# EAGLE board warp-revC (EAGLE 9.4.2)
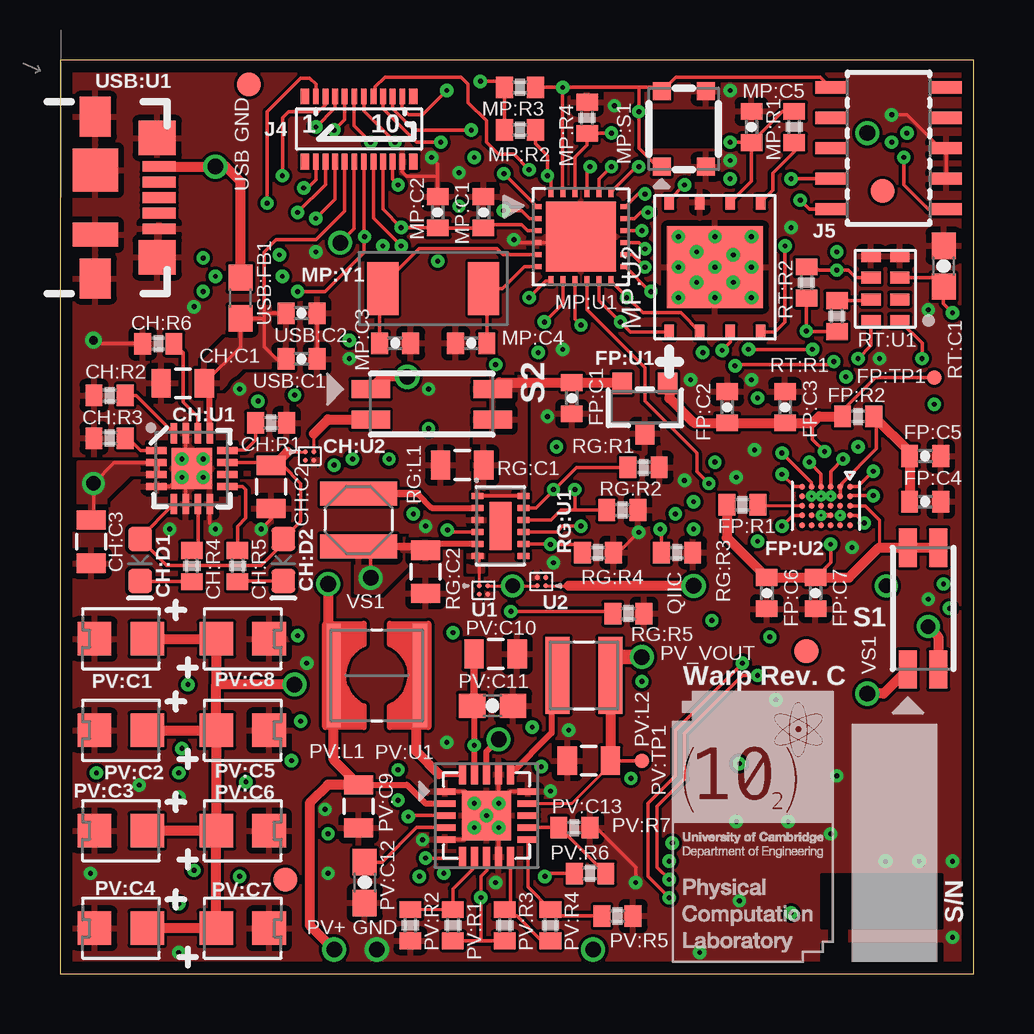
[diagram p0: board, top side]
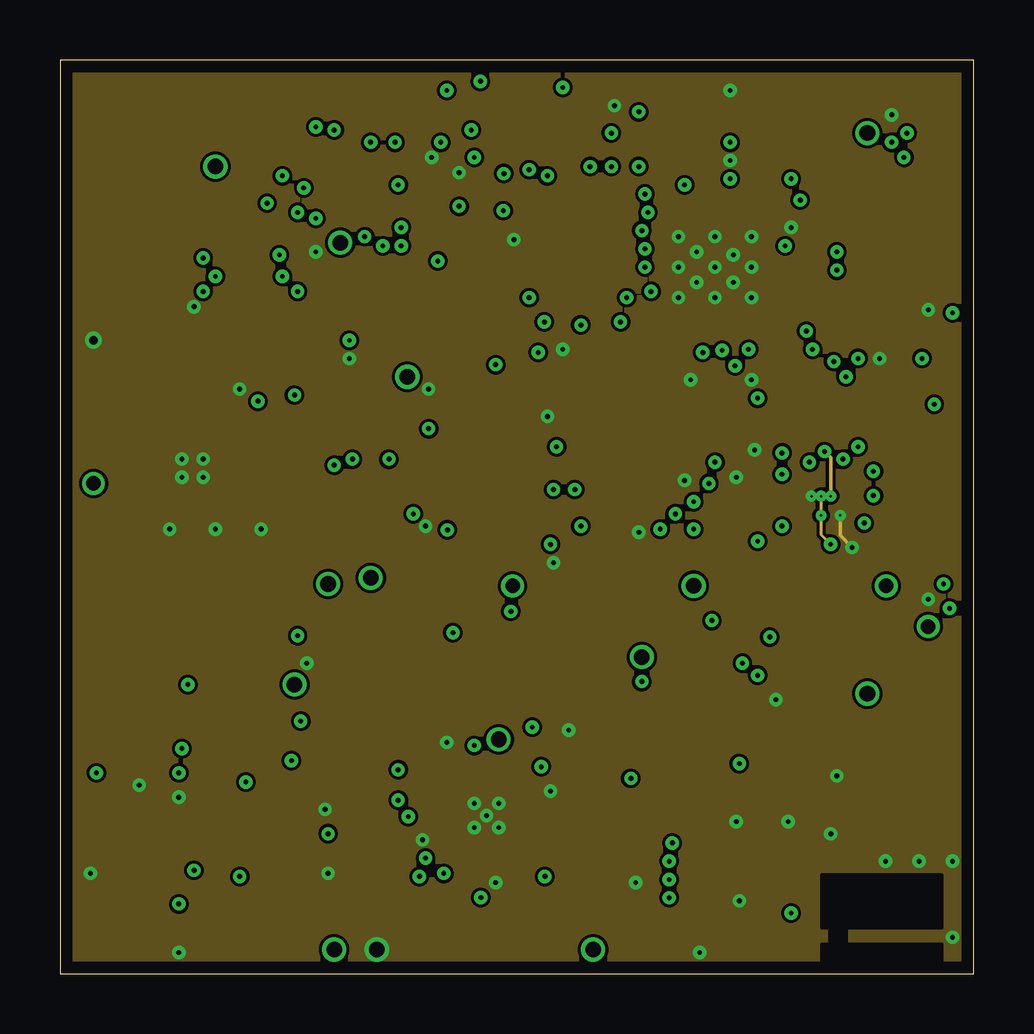
[diagram p1: board, inner layer Route2]
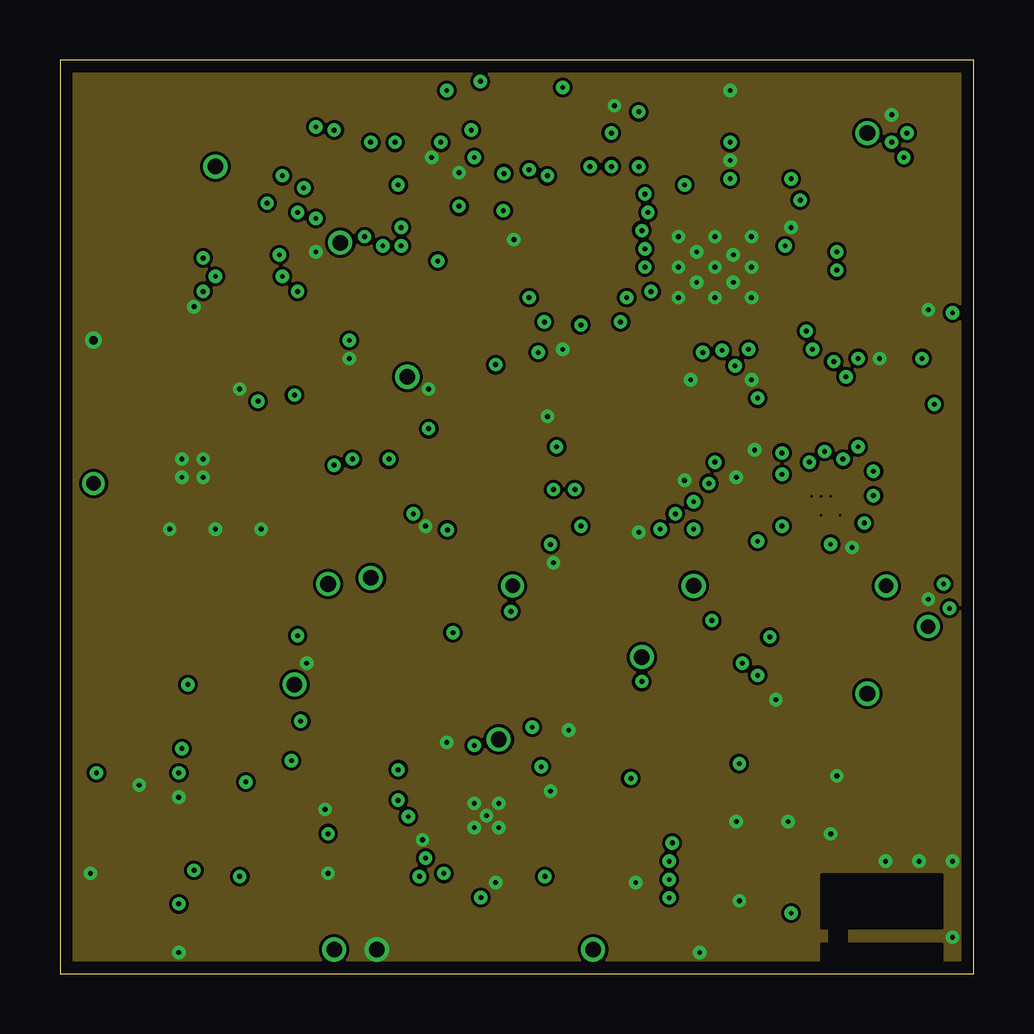
[diagram p2: board, inner layer Route3]
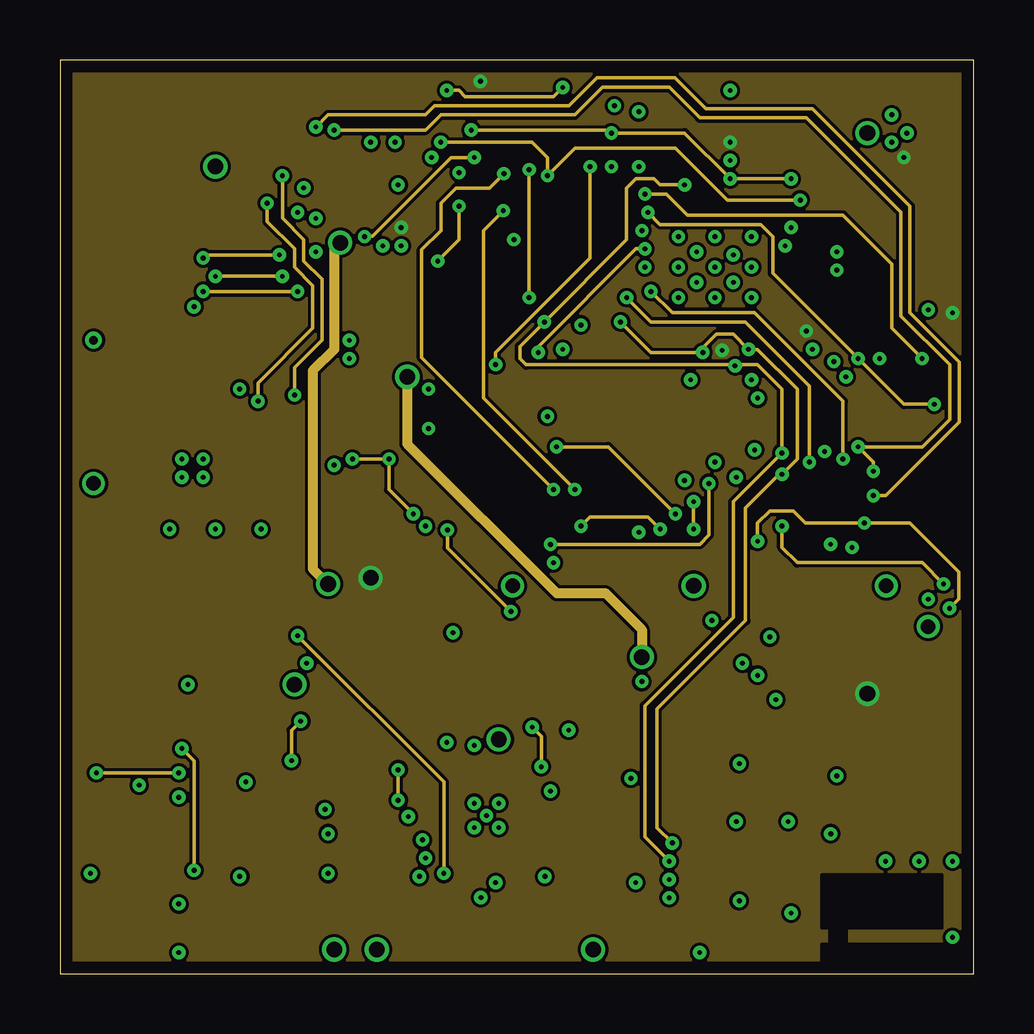
[diagram p3: board, inner layer Route4]
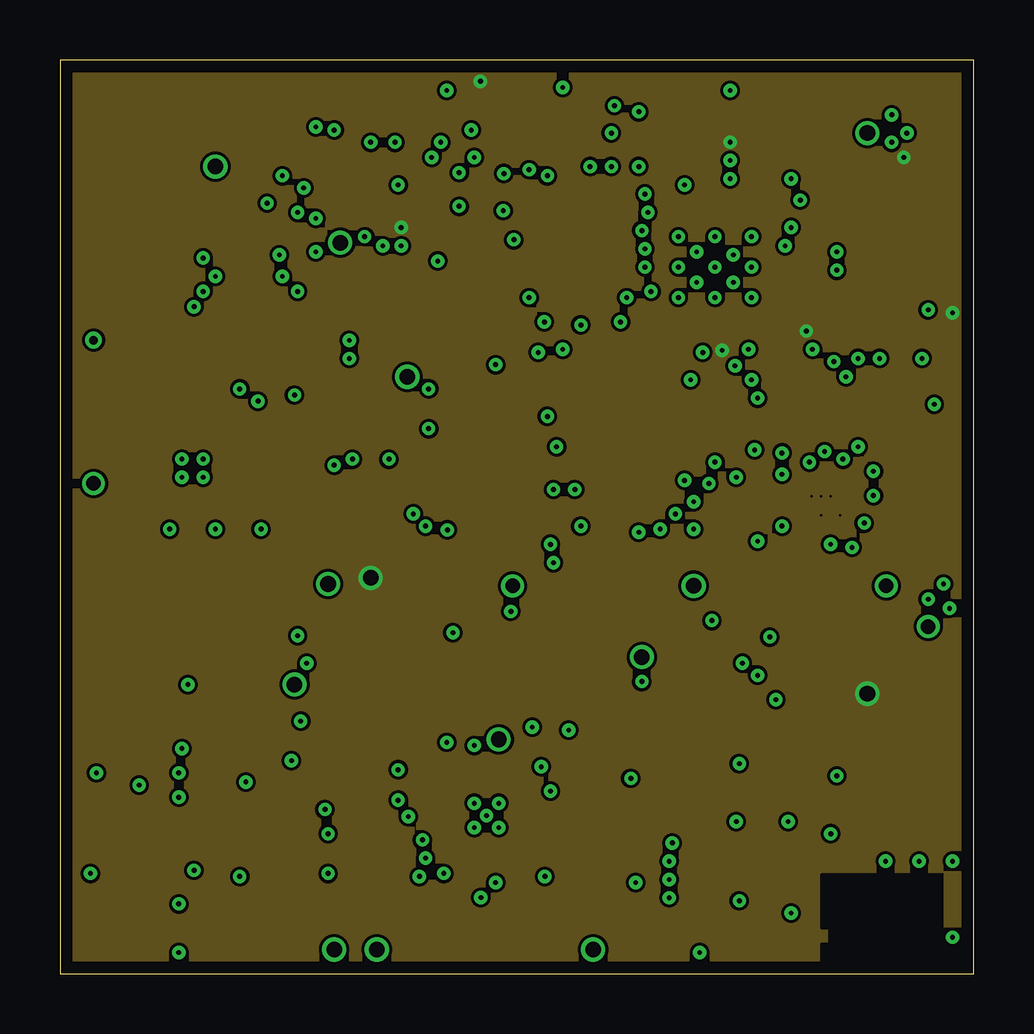
[diagram p4: board, inner layer Route5]
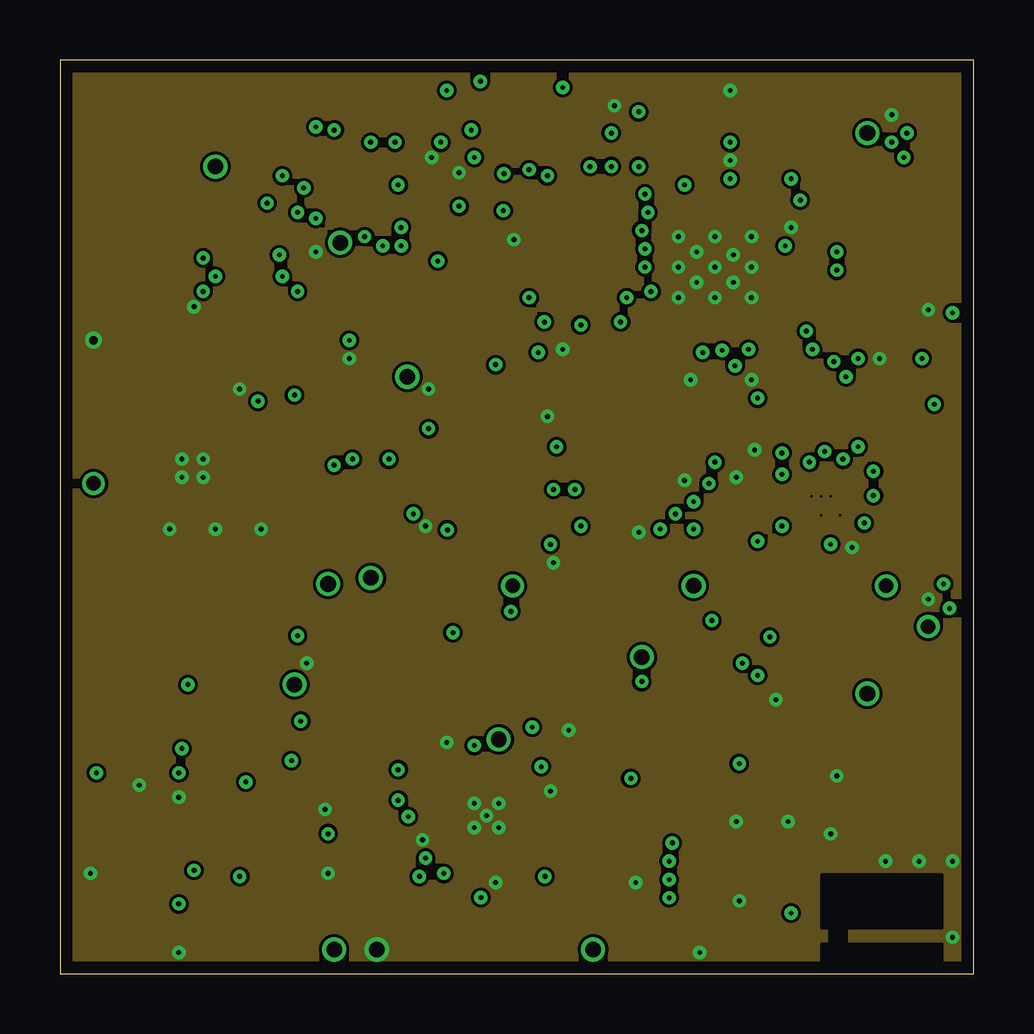
[diagram p5: board, inner layer Route6]
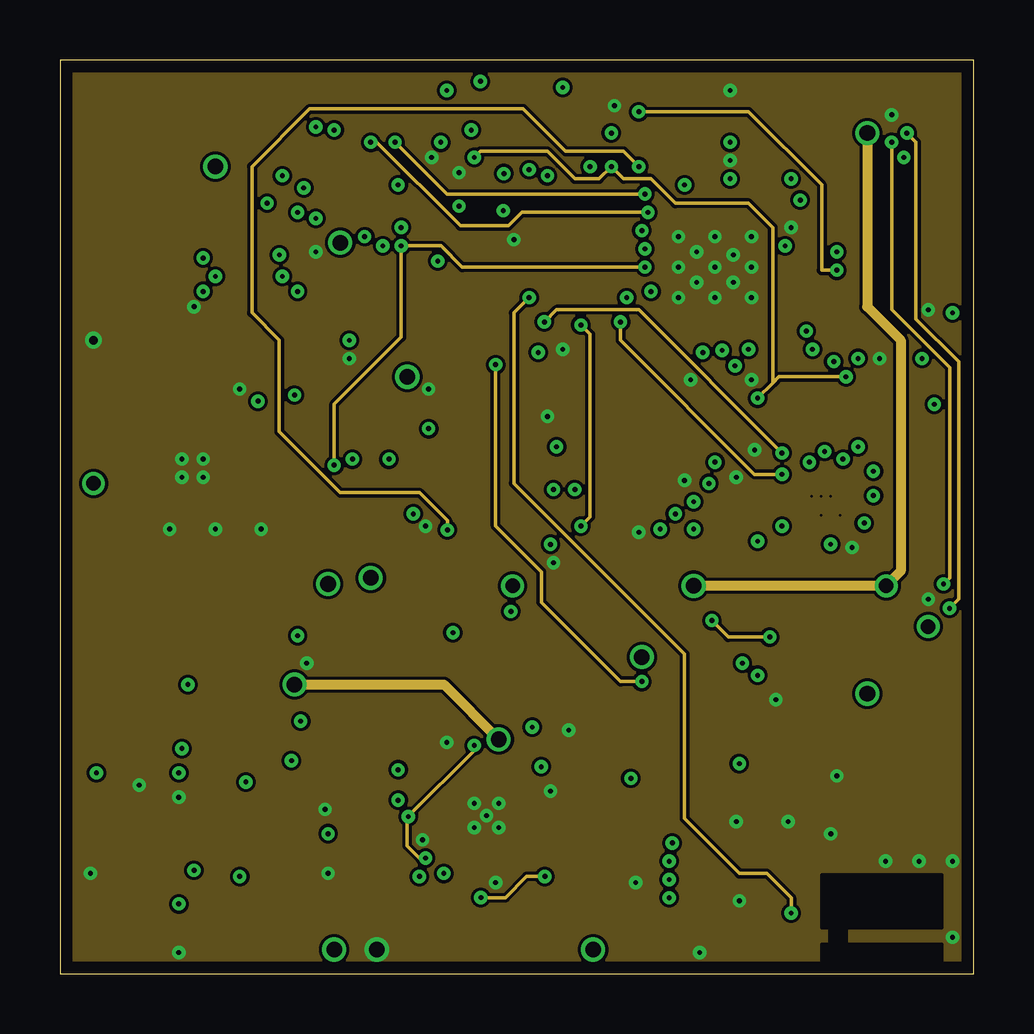
[diagram p6: board, inner layer Route7]
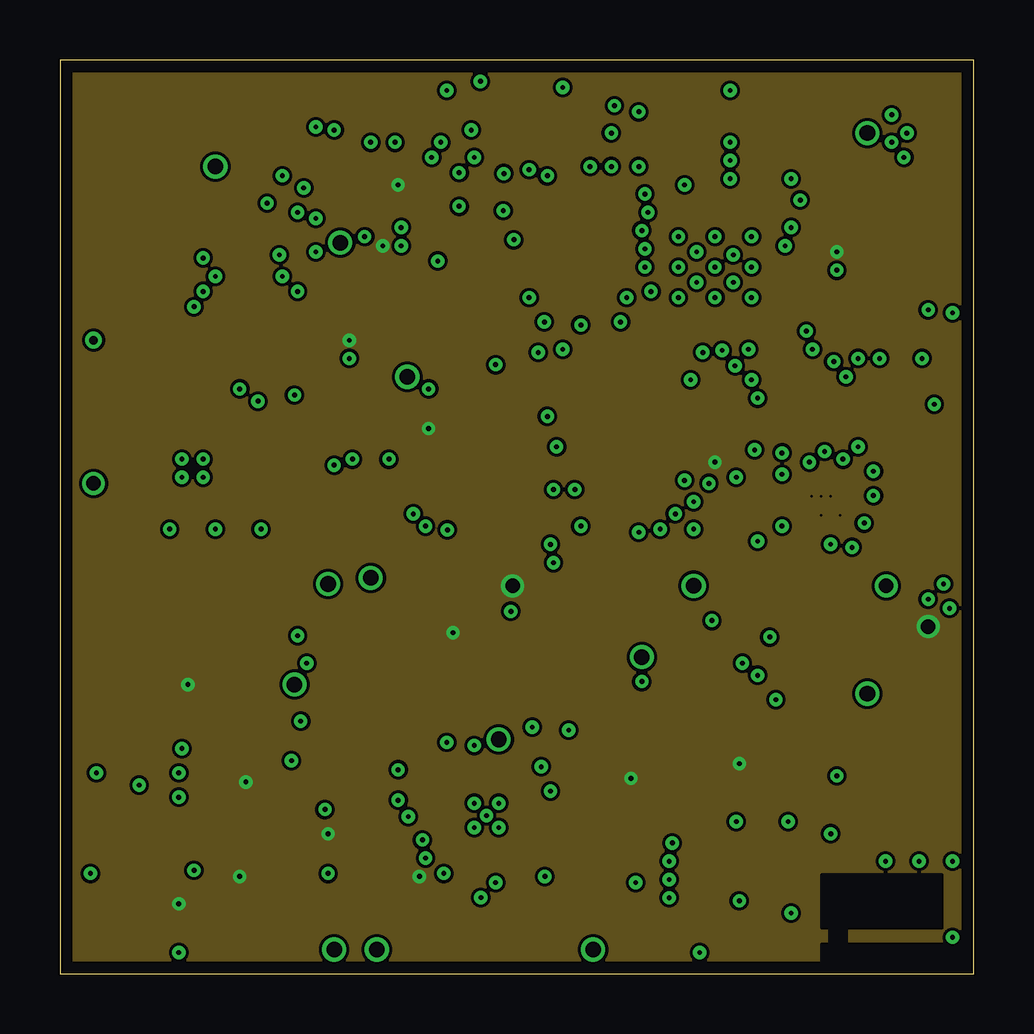
[diagram p7: board, inner layer Route14]
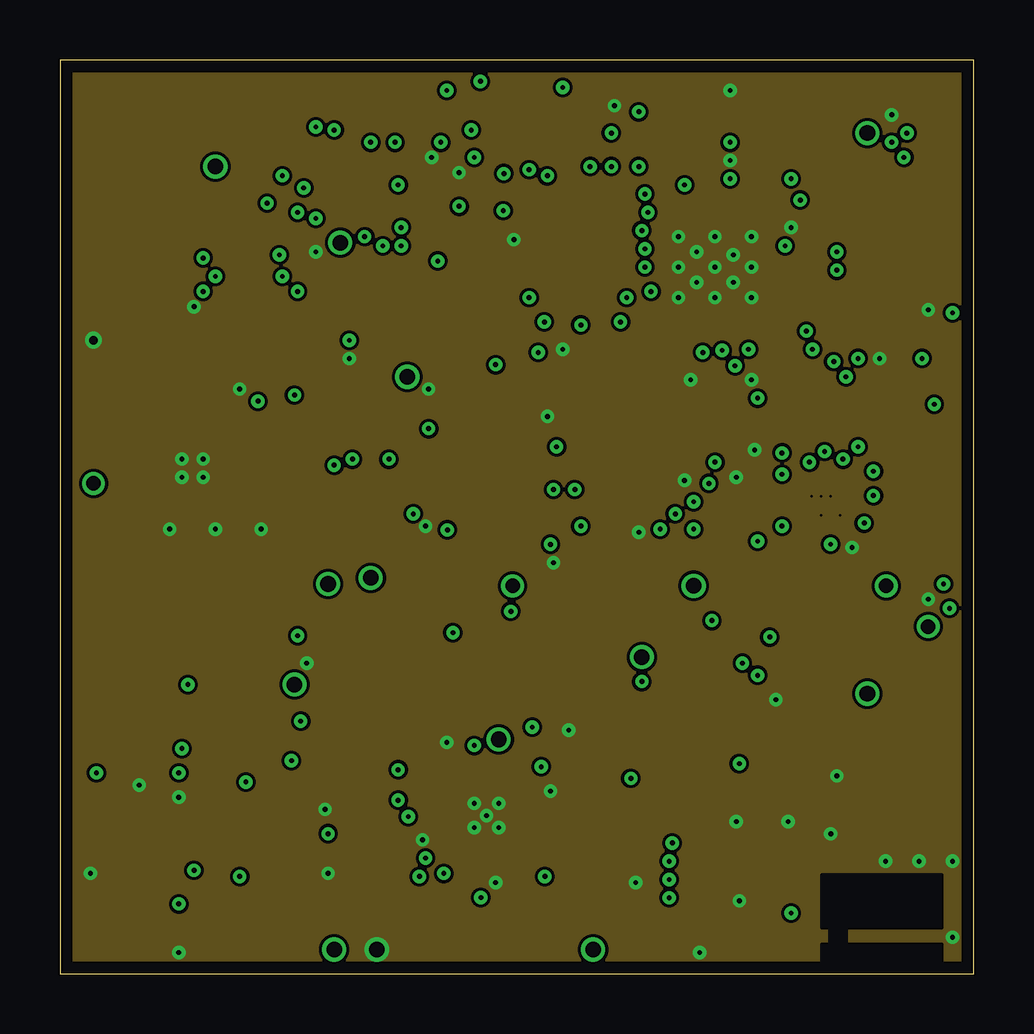
[diagram p8: board, inner layer Route15]
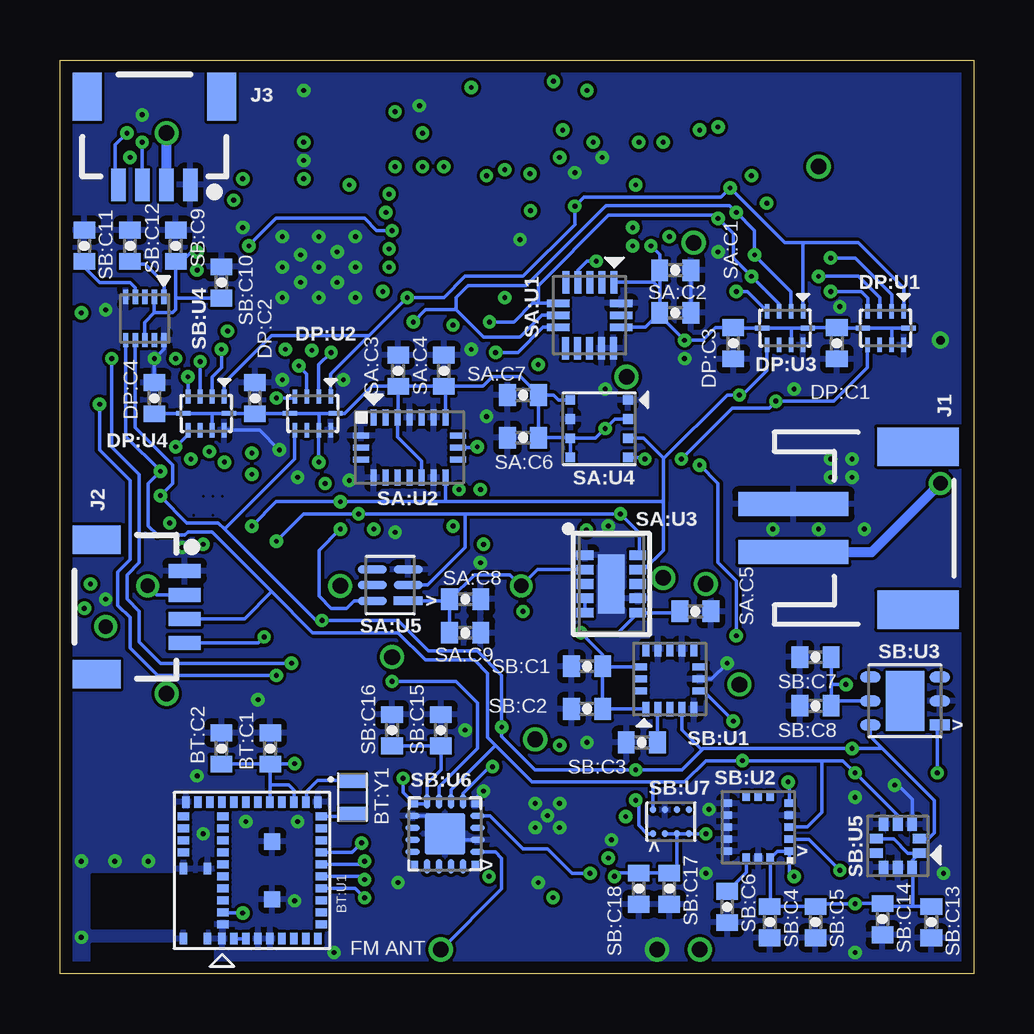
[diagram p9: board, bottom side, seen from below]

Size 38.1 x 38.1 mm. Coordinates in mm from the lower left corner, seen from the top.
Outline: 0,0 38.1,0 38.1,38.1 0,38.1 0,0
Copper layers [2:(1+(2*3)+4*5+6*7+14*15+16)]: Top 0.035mm / dielectric 0.1mm / Route2 0.035mm / dielectric 0.18mm / Route3 0.035mm / dielectric 0.1mm / Route4 0.035mm / dielectric 0.15mm / Route5 0.035mm / dielectric 0.2mm / Route6 0.035mm / dielectric 0.15mm / Route7 0.035mm / dielectric 0.2mm / Route14 0.035mm / dielectric 0.18mm / Route15 0.035mm / dielectric 0.1mm / Bottom 0.035mm
Design rules "default *": minimum track width 5mil, minimum drill 0.2mm, track to track 5mil, track to pad 5mil, pad to pad 5mil, via to via 6mil, smd to smd 5mil, copper to edge 20mil, drill to drill 10mil, minimum pad ring 7mil, minimum via ring 7mil, stop-mask expansion 4mil, vias tented up to drill 10mil, thermal gap 10mil

## Footprints (pad centres in the part's own frame; a part is rotated, then mirrored left to right if it is on the bottom)
0402-CAP = smd 0.7 x 0.9: 1 -0.65,0; 2 0.65,0
BGX13S = smd 0.48 x 0.32: 1 -2.85,1.25; 2 -2.85,0.75; 3 -2.85,0.25; 4 -2.85,-0.25; 5 -2.85,-0.75; 6 -2.85,-1.25; 7 -2.85,-1.75; 8 -2.85,-2.25; 9 -2.85,-2.75; 20 2.85,-2.75; 21 2.85,-2.25; 22 2.85,-1.75; 23 2.85,-1.25; 24 2.85,-0.75; 25 2.85,-0.25; 26 2.85,0.25; 27 2.85,0.75; 28 2.85,1.25; 29 2.85,1.75; 30 2.85,2.25; 31 2.85,2.75; 46 0.07,2.85; 47 -2.85,2.85; 48 0.07,1.85; 49 -2.85,1.85 | smd 0.32 x 0.48: 10 -2.25,-2.9; 11 -1.75,-2.9; 12 -1.25,-2.9; 13 -0.75,-2.9; 14 -0.25,-2.9; 15 0.25,-2.9; 16 0.75,-2.9; 17 1.25,-2.9; 18 1.75,-2.9; 19 2.25,-2.9; 32 2.25,2.85; 33 1.75,2.85; 34 1.25,2.85; 35 0.75,2.85; 36 2.25,1.2; 37 1.75,1.2; 38 1.25,1.2; 39 0.75,1.2; 40 0.25,1.2; 41 -0.25,1.2; 42 -0.75,1.2; 43 -1.25,1.2; 44 -1.75,1.2; 45 -2.25,1.2 | smd 0.67 x 0.67: 50 1.2,-0.85; 51 -1.2,-0.85
IQXC-25 = smd 0.6 x 1.1: 1 -0.7,0; 2 0.7,0
0805 = smd 0.8 x 1.2: 1 -0.9,0; 2 0.9,0
LED-0603 = smd 1 x 1: A -0.877,0; C 0.877,0
0402-RES = smd 0.7 x 0.9: 1 -0.65,0; 2 0.65,0
PVQFN-N16 = smd 0.28 x 0.85: 1 -0.75,-1.475; 2 -0.25,-1.475; 3 0.25,-1.475; 4 0.75,-1.475; 9 0.75,1.475; 10 0.25,1.475; 11 -0.25,1.475; 12 -0.75,1.475 | smd 0.85 x 0.28: 5 1.475,-0.75; 6 1.475,-0.25; 7 1.475,0.25; 8 1.475,0.75; 13 -1.475,0.75; 14 -1.475,0.25; 15 -1.475,-0.25; 16 -1.475,-0.75 | smd 1.7 x 1.7: EP 0,0
DSBGA = smd 0.2 x 0.2: A1 -0.175,0.175; A2 0.175,0.175; B1 -0.175,-0.175; B2 0.175,-0.175
ISL23415 = smd 0.2 x 0.6: 1 0.75,0.7; 2 0.25,0.7; 3 -0.25,0.7; 4 -0.75,0.7; 6 -0.75,-0.7; 7 -0.25,-0.7; 8 0.25,-0.7; 9 0.75,-0.7 | smd 0.6 x 0.2: 5 -0.95,0; 10 0.95,0
FIDUCIAL-1X2 = smd 1 x 1: 1 0,0
TP06R = smd 0.6 x 0.6: TP 0,0
SOT23-3 = smd 0.8 x 0.9: 1 -0.95,-1; 2 0.95,-1; 3 0,1.1
LATTICE-WLCSP-30 = smd 0.26 x 0.26: A1 -0.8,1; A2 -0.4,1; A3 0,1; A4 0.4,1; A5 0.8,1; B1 -0.8,0.6; B2 -0.4,0.6; B3 0,0.6; B4 0.4,0.6; B5 0.8,0.6; C1 -0.8,0.2; C2 -0.4,0.2; C3 0,0.2; C4 0.4,0.2; C5 0.8,0.2; D1 -0.8,-0.2; D2 -0.4,-0.2; D3 0,-0.2; D4 0.4,-0.2; D5 0.8,-0.2; E1 -0.8,-0.6; E2 -0.4,-0.6; E3 0,-0.6; E4 0.4,-0.6; E5 0.8,-0.6; F1 -0.8,-1; F2 -0.4,-1; F3 0,-1; F4 0.4,-1; F5 0.8,-1
JST-2-SMD = smd 1 x 4.6: 1 -1,-3.7; 2 1,-3.7 | smd 1.6 x 3.4: NC1 -3.4,1.5; NC2 3.4,1.5
1X04_1MM_RA = smd 0.6 x 1.35: 1 -1.5,0; 2 -0.5,0; 3 0.5,0; 4 1.5,0 | smd 1.2 x 2: NC1 2.8,-3.675; NC2 -2.8,-3.675
DF40C-20DP-0.4V(51) = smd 0.24 x 0.66: P$1 0,0; P$2 0.4,0; P$3 0.8,0; P$4 1.2,0; P$5 1.6,0; P$6 2,0; P$7 2.4,0; P$8 2.8,0; P$9 3.2,0; P$10 3.6,0; P$11 0,-2.71; P$12 0.4,-2.71; P$13 0.8,-2.71; P$14 1.2,-2.71; P$15 1.6,-2.71; P$16 2,-2.71; P$17 2.4,-2.71; P$18 2.8,-2.71; P$19 3.2,-2.71; P$20 3.6,-2.71 | smd 0.36 x 0.66: P$21 -0.46,0; P$22 4.06,0; P$23 -0.46,-2.71; P$24 4.06,-2.71
SAMTECH_FTSH-105-01 = smd 0.508 x 1.27: 1 -2.54,-2.413; 2 -2.54,2.413; 3 -1.27,-2.413; 4 -1.27,2.413; 5 0,-2.413; 6 0,2.413; 7 1.27,-2.413; 8 1.27,2.413; 9 2.54,-2.413; 10 2.54,2.413
EVPAYG0BA = smd 0.75 x 0.75: A 0.375,2.22; A' 3.525,2.22; B 0.375,0.38; B' 3.525,0.38
MKL03Z32VFK4R = smd 0.4 x 0.2: P$1 -1.85,1.25; P$2 -1.85,0.75; P$3 -1.85,0.25; P$4 -1.85,-0.25; P$5 -1.85,-0.75; P$6 -1.85,-1.25; P$13 1.85,-1.25; P$14 1.85,-0.75; P$15 1.85,-0.25; P$16 1.85,0.25; P$17 1.85,0.75; P$18 1.85,1.25 | smd 0.2 x 0.4: P$7 -1.25,-1.85; P$8 -0.75,-1.85; P$9 -0.25,-1.85; P$10 0.25,-1.85; P$11 0.75,-1.85; P$12 1.25,-1.85; P$19 1.25,1.85; P$20 0.75,1.85; P$21 0.25,1.85; P$22 -0.25,1.85; P$23 -0.75,1.85; P$24 -1.25,1.85 | smd 2.9 x 2.9: P$PAD 0,0
UDFN = smd 0.6 x 0.4: 1 -2.7,1.905; 2 -2.7,0.635; 3 -2.7,-0.635; 4 -2.7,-1.905; 5 2.7,-1.905; 6 2.7,-0.635; 7 2.7,0.635; 8 2.7,1.905 | smd 3.4 x 4: 9 0,0
CM519 = smd 1.3 x 2.2: P$1 0,0; P$2 4.2,0
CPX3225A752D = smd 1.4 x 1.4: + -1.1,0; - 1.1,0
0603-CAP = smd 1.1 x 1: 1 -0.85,0; 2 0.85,0
WE-TPC_3816 = smd 0.6 x 4.3: 1 -1.8,0; 2 1.8,0
WE-TPC_2811/2813_OLD = smd 1 x 3.2: 1 -1.1,0; 2 1.1,0
BQ25570 = smd 0.85 x 0.28: 1 -1.725,1; 2 -1.725,0.5; 3 -1.725,0; 4 -1.725,-0.5; 5 -1.725,-1; 11 1.725,-1; 12 1.725,-0.5; 13 1.725,0; 14 1.725,0.5; 15 1.725,1 | smd 0.28 x 0.85: 6 -1,-1.725; 7 -0.5,-1.725; 8 0,-1.725; 9 0.5,-1.725; 10 1,-1.725; 16 1,1.725; 17 0.5,1.725; 18 0,1.725; 19 -0.5,1.725; 20 -1,1.725 | smd 2.05 x 2.05: 21 0,0
WE-TPC_2828_OLD = smd 1 x 3.2: 1 -1.1,0; 2 1.1,0
WSON-12 = smd 0.25 x 0.5: 1 -1.25,-0.95; 2 -0.75,-0.95; 3 -0.25,-0.95; 4 0.25,-0.95; 5 0.75,-0.95; 6 1.25,-0.95; 7 1.25,0.95; 8 0.75,0.95; 9 0.25,0.95; 10 -0.25,0.95; 11 -0.75,0.95; 12 -1.25,0.95 | smd 2 x 0.9: PAD 0,0
RV-C7 = smd 0.5 x 0.8: 1 1.35,0.6; 2 0.45,0.6; 3 -0.45,0.6; 4 -1.35,0.6; 5 -1.35,-0.6; 6 -0.45,-0.6; 7 0.45,-0.6; 8 1.35,-0.6
CHS-02_SWITCH = smd 0.76 x 1.6: 1 -1.905,-2.54; 1' -1.905,2.54; 2 -0.635,-2.54; 2' -0.635,2.54
ADXL362 = smd 0.925 x 0.3: P$1 -1.274,1.001; P$2 -1.274,0.501; P$3 -1.274,0.001; P$4 -1.274,-0.499; P$5 -1.274,-0.999; P$9 1.476,-1.024; P$10 1.476,-0.524; P$11 1.476,-0.024; P$12 1.476,0.476; P$13 1.476,0.976 | smd 0.3 x 0.925: P$6 -0.399,-1.324; P$7 0.101,-1.324; P$8 0.601,-1.324; P$14 0.601,1.301; P$15 0.101,1.301; P$16 -0.399,1.301
BMX055 = smd 0.25 x 0.675: P$1 -1.536,1.226; P$2 -1.036,1.226; P$3 -0.536,1.226; P$4 -0.036,1.226; P$5 0.464,1.226; P$6 0.964,1.226; P$7 1.464,1.226; P$11 1.464,-1.274; P$12 0.964,-1.274; P$13 0.464,-1.274; P$14 -0.036,-1.274; P$15 -0.536,-1.274; P$16 -1.036,-1.274; P$17 -1.536,-1.274 | smd 0.675 x 0.25: P$8 1.989,0.476; P$9 1.989,-0.024; P$10 1.989,-0.524; P$18 -2.051,-0.524; P$19 -2.051,-0.024; P$20 -2.051,0.476
LGA10 = smd 0.7 x 0.4: 1 -1.1,1.2; 2 -1.1,0.6; 3 -1.1,0; 4 -1.1,-0.6; 5 -1.1,-1.2; 6 1.1,-1.2; 7 1.1,-0.6; 8 1.1,0; 9 1.1,0.6; 10 1.1,1.2 | smd 1.1 x 2.45: EP 0,0
BME680 = smd 0.4 x 0.4: 1 1.2,1.2; 2 1.2,0.4; 3 1.2,-0.4; 4 1.2,-1.2; 5 -1.2,-1.2; 6 -1.2,-0.4; 7 -1.2,0.4; 8 -1.2,1.2
TCS3772 = smd 1.2 x 0.35: P$1 -0.8,0.7; P$2 -0.8,0.05; P$3 -0.8,-0.6; P$4 0.7,-0.6; P$5 0.7,0.05; P$6 0.7,0.7
MMA8451Q = smd 0.6 x 0.3: P$1 -1.274,0.976; P$2 -1.274,0.476; P$3 -1.274,-0.024; P$4 -1.274,-0.524; P$5 -1.274,-1.024; P$9 1.226,-1.024; P$10 1.226,-0.524; P$11 1.226,-0.024; P$12 1.226,0.476; P$13 1.226,0.976 | smd 0.3 x 0.6: P$6 -0.524,-1.274; P$7 -0.024,-1.274; P$8 0.476,-1.274; P$14 0.476,1.226; P$15 -0.024,1.226; P$16 -0.524,1.226
L3GD20H = smd 0.4 x 0.3: P$1 -1.324,0.976; P$2 -1.324,0.476; P$3 -1.324,-0.024; P$4 -1.324,-0.524; P$5 -1.324,-1.024; P$9 1.276,-1.024; P$10 1.276,-0.524; P$11 1.276,-0.024; P$12 1.276,0.476; P$13 1.276,0.976 | smd 0.3 x 0.4: P$6 -0.524,-1.324; P$7 -0.024,-1.324; P$8 0.476,-1.324; P$14 0.476,1.276; P$15 -0.024,1.276; P$16 -0.524,1.276
SI7021 = smd 0.85 x 0.45: P$1 -1.5,1.05; P$2 -1.5,0.05; P$3 -1.5,-0.95; P$4 1.4,-0.95; P$5 1.4,0.05; P$6 1.4,1.05 | smd 1.6 x 2.5: P$7 -0.05,0.05
MAG3110 = smd 0.6 x 0.225: P$1 -0.916,0.784; P$2 -0.916,0.384; P$3 -0.916,-0.016; P$4 -0.916,-0.416; P$5 -0.916,-0.816; P$6 0.884,-0.816; P$7 0.884,-0.416; P$8 0.884,-0.016; P$9 0.884,0.384; P$10 0.884,0.784
LPS25H = smd 0.4 x 0.55: P$1 0.3,0.9; P$2 -0.3,0.9; P$6 -0.3,-0.9; P$7 0.3,-0.9 | smd 0.55 x 0.4: P$3 -0.9,0.6; P$4 -0.9,0; P$5 -0.9,-0.6; P$8 0.9,-0.6; P$9 0.9,0; P$10 0.9,0.6
SI4705 = smd 0.3 x 0.3: P$1 -1.31,1.28; P$6 -1.31,-1.25; P$11 1.22,-1.25; P$16 1.22,1.28 | smd 0.61 x 0.28: P$2 -1.4,0.75; P$3 -1.4,0.25; P$4 -1.4,-0.25; P$5 -1.4,-0.75; P$12 1.31,-0.75; P$13 1.31,-0.25; P$14 1.31,0.25; P$15 1.31,0.75 | smd 0.28 x 0.61: P$7 -0.8,-1.35; P$8 -0.3,-1.35; P$9 0.2,-1.35; P$10 0.7,-1.35; P$17 0.7,1.36; P$18 0.2,1.36; P$19 -0.3,1.36; P$20 -0.8,1.36 | smd 1.7 x 1.7: P$21 -0.05,0
HDC1000 = smd 0.275 x 0.275: A1 -0.5,0.8; A2 0.5,0.8; B1 -0.5,0.3; B2 0.5,0.3; C1 -0.5,-0.2; C2 0.5,-0.2; D1 -0.5,-0.7; D2 0.5,-0.7
0603 = smd 1.1 x 1: 1 -0.85,0; 2 0.85,0
USB-B-MICRO-SMD = smd 1.38 x 0.45: D+ 2.66,0; D- 2.66,0.65; GND 2.66,-1.3; ID 2.66,-0.65; VBUS 2.66,1.3 | smd 1.3 x 1.65: S1 0,3.375; S4 0,-3.375 | smd 1.9 x 1.8: S2 0,1.15 | smd 1.9 x 1: S3 0,-1.55 | smd 1.55 x 1.425: S5 2.575,2.487; S6 2.575,-2.487

## Placement (x,y rotation side)
BT:C1  0.1uF  [0402-CAP]  29.34,9.4 90 bottom
BT:C2  1uF  [0402-CAP]  31.37,9.4 90 bottom
BT:U1  BGX13S22GA-V21R  [BGX13S]  30.1,4.32 90 bottom
BT:Y1  IQXC-25  [IQXC-25]  25.91,7.37 270 bottom
CH:C1  1uF  [0805]  5.12,24.62 180 top
CH:C2  4.7uF  [0805]  8.8,20.3 270 top
CH:C3  4.7uF  [0805]  1.31,18.02 270 top
CH:D1  [LED-0603]  3.34,17.26 270 top
CH:D2  [LED-0603]  9.31,17.26 270 top
CH:R1  2.94k  [0402-RES]  8.8,22.97 180 top
CH:R2  4.32k  [0402-RES]  2.07,24.11 0 top
CH:R3  10k  [0402-RES]  2.07,22.34 0 top
CH:R4  4.7k  [0402-RES]  5.5,17 270 top
CH:R5  4.7k  [0402-RES]  7.4,17 270 top
CH:R6  56.2k  [0402-RES]  4.1,26.27 0 top
CH:U1  BQ24230VQFN  [PVQFN-N16]  5.5,21.07 270 top
CH:U2  MAX40200  [DSBGA]  10.41,21.59 0 top
DP:C1  0.1uF  [0402-CAP]  5.71,26.29 270 bottom
DP:C2  0.1uF  [0402-CAP]  29.97,24 90 bottom
DP:C3  0.1uF  [0402-CAP]  10.03,26.29 270 bottom
DP:C4  0.1uF  [0402-CAP]  34.16,24 90 bottom
DP:U1  ISL23415UTQFN  [ISL23415]  3.68,26.92 0 bottom
DP:U2  ISL23415UTQFN  [ISL23415]  27.56,23.37 0 bottom
DP:U3  ISL23415UTQFN  [ISL23415]  7.87,26.92 0 bottom
DP:U4  ISL23415UTQFN  [ISL23415]  32,23.37 0 bottom
FD1  FIDUCIAL1X2  [FIDUCIAL-1X2]  9.4,3.94 0 top
FD2  FIDUCIAL1X2  [FIDUCIAL-1X2]  34.29,32.64 0 top
FD3  FIDUCIAL1X2  [FIDUCIAL-1X2]  31.11,13.46 0 top
FD4  FIDUCIAL1X2  [FIDUCIAL-1X2]  7.87,37.08 0 top
FP:C1  1uF  [0402-CAP]  21.34,24 270 top
FP:C2  1uF  [0402-CAP]  27.81,23.62 90 top
FP:C3  0.1uF  [0402-CAP]  30.23,23.62 90 top
FP:C4  0.1uF  [0402-CAP]  36.07,19.68 0 top
FP:C5  10uF  [0402-CAP]  36.07,21.59 0 top
FP:C6  10uF  [0402-CAP]  29.46,15.88 270 top
FP:C7  0.1uF  [0402-CAP]  31.5,15.88 270 top
FP:R1  10k  [0402-RES]  28.45,19.56 180 top
FP:R2  100  [0402-RES]  33.27,23.24 180 top
FP:TP1  TPSTP06R  [TP06R]  36.44,24.86 270 top
FP:U1  MCP1811AT-012/TTSOT-23-3  [SOT23-3]  24.38,23.62 180 top
FP:U2  ICE40UP5K-UWG30  [LATTICE-WLCSP-30]  31.93,19.51 270 top
J1  [JST-2-SMD]  3.83,18.58 270 bottom
J2  QIIC connector  [1X04_1MM_RA]  32.9,15.3 270 bottom
J3  QIIC connector  [1X04_1MM_RA]  34.16,32.89 180 bottom
J4  DF40FC-20DP-0.4V(51)  [DF40C-20DP-0.4V(51)]  10.67,36.58 0 top
J5  CORTEX_DEBUG_SMD  [SAMTECH_FTSH-105-01]  34.54,34.42 90 top
MP:C1  0.1uF  [0402-CAP]  17.65,31.75 90 top
MP:C2  4.7uF (pol)  [0402-CAP]  15.75,31.75 90 top
MP:C3  33pF  [0402-CAP]  13.97,26.29 0 top
MP:C4  33pF  [0402-CAP]  17.14,26.29 180 top
MP:C5  0.1uF  [0402-CAP]  28.83,35.31 90 top
MP:R1  10k  [0402-RES]  30.61,35.31 90 top
MP:R2  10k  [0402-RES]  19.18,35.18 180 top
MP:R3  4.7k  [0402-RES]  19.18,36.96 180 top
MP:R4  10k  [0402-RES]  21.97,35.69 90 top
MP:S1  EVPAYG0BAEVPAYG0BA  [EVPAYG0BA]  27.3,33.27 90 top
MP:U1  MKL03Z32VFK4RQFN24  [MKL03Z32VFK4R]  21.72,30.73 0 top
MP:U2  AT45DB641E-MHN-Y  [UDFN]  27.3,29.46 90 top
MP:Y1  CM519-SMD  [CM519]  13.46,28.57 0 top
PV:C1  CPX3225A7552D  [CPX3225A752D]  2.54,13.97 180 top
PV:C2  CPX3225A7552D  [CPX3225A752D]  2.54,10.16 180 top
PV:C3  CPX3225A7552D  [CPX3225A752D]  2.54,5.97 180 top
PV:C4  CPX3225A7552D  [CPX3225A752D]  2.54,1.91 180 top
PV:C5  CPX3225A7552D  [CPX3225A752D]  7.62,10.16 0 top
PV:C6  CPX3225A7552D  [CPX3225A752D]  7.62,5.97 0 top
PV:C7  CPX3225A7552D  [CPX3225A752D]  7.62,1.91 0 top
PV:C8  CPX3225A7552D  [CPX3225A752D]  7.62,13.97 0 top
PV:C9  4.7uF  [0805]  12.45,6.99 270 top
PV:C10  4.7uF  [0805]  18.16,13.34 0 top
PV:C11  0.1uF  [0603-CAP]  18.03,11.18 0 top
PV:C12  10nF  [0603-CAP]  12.7,3.81 270 top
PV:C13  22uF  [0805]  22.05,8.89 180 top
PV:L1  22uH  [WE-TPC_3816]  13.21,12.45 0 top
PV:L2  10uH  [WE-TPC_2811/2813_OLD]  21.84,12.45 0 top
PV:R1  4.02M  [0402-RES]  16.38,2.03 270 top
PV:R2  9.09M  [0402-RES]  14.61,2.03 90 top
PV:R3  1.3M  [0402-RES]  18.54,2.03 270 top
PV:R4  5.36M  [0402-RES]  20.45,2.03 270 top
PV:R5  6.49M  [0402-RES]  23.24,2.41 180 top
PV:R6  8.87M  [0402-RES]  22.1,4.19 180 top
PV:R7  4.22M  [0402-RES]  21.44,6.1 180 top
PV:TP1  TPSTP06R  [TP06R]  24.26,8.89 0 top
PV:U1  BQ25570PVQFN  [BQ25570]  17.78,6.6 0 top
RG:C1  10uF  [0805]  16.76,21.21 180 top
RG:C2  10uF  [0805]  15.24,16.76 270 top
RG:L1  2.2uH  [WE-TPC_2828_OLD]  12.45,18.92 270 top
RG:R1  2M  [0402-RES]  24.33,21.12 180 top
RG:R2  2M  [0402-RES]  23.44,19.34 180 top
RG:R3  2M  [0402-RES]  25.73,17.56 180 top
RG:R4  2M  [0402-RES]  22.43,17.56 180 top
RG:R5  2M  [0402-RES]  23.7,15.02 180 top
RG:U1  TPS6274XWSON  [WSON-12]  18.36,18.68 270 top
RT:C1  0.1uF  [0603-CAP]  36.84,29.5 90 top
RT:R1  10k  [0402-RES]  32.39,27.42 270 top
RT:R2  10k  [0402-RES]  31.12,28.82 270 top
RT:U1  RV-8803-C7_RTC  [RV-C7]  34.41,28.57 270 top
S1  CHS-02_SWITCH  [CHS-02_SWITCH]  37.25,15.23 0 top
S2  CHS-02_SWITCH  [CHS-02_SWITCH]  15.49,22.48 270 top
SA:C1  0.1uF  [0402-CAP]  12.45,29.34 0 bottom
SA:C2  1uF  [0402-CAP]  12.45,27.56 0 bottom
SA:C3  0.1uF  [0402-CAP]  24,25.15 90 bottom
SA:C4  1uF  [0402-CAP]  22.1,25.15 90 bottom
SA:C5  4.7uF  [0402-CAP]  11.61,15.11 0 bottom
SA:C6  0.1uF  [0402-CAP]  18.8,22.35 180 bottom
SA:C7  1uF  [0402-CAP]  18.8,24.13 180 bottom
SA:C8  0.1uF  [0402-CAP]  21.21,15.62 0 bottom
SA:C9  1uF  [0402-CAP]  21.21,14.22 0 bottom
SA:U1  ADXL362  [ADXL362]  16,27.56 270 bottom
SA:U2  BMX055  [BMX055]  23.5,21.97 0 bottom
SA:U3  CCS811  [LGA10]  15.11,16.26 0 bottom
SA:U4  BME680LGA  [BME680]  15.62,22.73 0 bottom
SA:U5  TCS34725FN  [TCS3772]  24.38,16.26 180 bottom
SB:C1  0.1uF  [0402-CAP]  16.13,12.83 180 bottom
SB:C2  1uF  [0402-CAP]  16.13,11.05 180 bottom
SB:C3  0.1uF  [0402-CAP]  13.84,9.65 180 bottom
SB:C4  0.1uF  [0402-CAP]  8.51,2.16 270 bottom
SB:C5  10uF  [0402-CAP]  6.6,2.16 270 bottom
SB:C6  10nF (25V)  [0402-CAP]  10.29,2.79 270 bottom
SB:C7  0.1uF  [0402-CAP]  6.6,13.21 180 bottom
SB:C8  1uF  [0402-CAP]  6.6,11.18 180 bottom
SB:C9  0.1uF  [0402-CAP]  33.27,30.35 90 bottom
SB:C10  1uF  [0402-CAP]  31.37,28.83 90 bottom
SB:C11  0.1uF  [0402-CAP]  37.08,30.35 90 bottom
SB:C12  0.1uF  [0402-CAP]  35.18,30.35 90 bottom
SB:C13  0.1uF  [0402-CAP]  1.78,2.16 270 bottom
SB:C14  4.7uF  [0402-CAP]  3.81,2.29 270 bottom
SB:C15  22nF  [0402-CAP]  22.23,10.16 90 bottom
SB:C16  0.1uF  [0402-CAP]  24.26,10.16 90 bottom
SB:C17  0.1uF  [0402-CAP]  12.7,3.56 270 bottom
SB:C18  1uF  [0402-CAP]  13.97,3.56 270 bottom
SB:U1  MMA8451Q  [MMA8451Q]  12.7,12.32 90 bottom
SB:U2  L3GD20H  [L3GD20H]  9.02,6.1 180 bottom
SB:U3  SI7021  [SI7021]  2.92,11.43 180 bottom
SB:U4  MAG3110  [MAG3110]  34.54,27.3 270 bottom
SB:U5  LPS25H  [LPS25H]  3.17,5.33 270 bottom
SB:U6  SI4705  [SI4705]  22.1,5.84 180 bottom
SB:U7  HDC1000  [HDC1000]  12.57,6.35 90 bottom
U1  MAX40200  [DSBGA]  17.65,16 0 top
U2  MAX40200  [DSBGA]  20.07,16.35 180 top
USB:C1  4.7uF (pol)  [0402-CAP]  10.07,25.64 0 top
USB:C2  0.1uF  [0402-CAP]  10.07,27.54 0 top
USB:FB1  600R/1A  [0603]  7.53,28.18 90 top
USB:U1  MOLEX_USB_47346-0001MICRO_USB_B  [USB-B-MICRO-SMD]  1.47,32.36 0 top

## Library data of the parts
BT:C1 BT:C2 CH:C1-CH:C3 CH:R1-CH:R6 DP:C1-DP:C4 FP:C1-FP:C7 FP:R1 FP:R2 MP:C1-MP:C5 MP:R1-MP:R4 PV:R1-PV:R7 RG:C1 RG:C2 RG:R1-RG:R5 RT:C1 RT:R1 RT:R2 SA:C1-SA:C9 SB:C1-SB:C18 USB:C1 USB:C2 USB:FB1 = SparkFun-Passives
BT:U1 = BGX13S
BT:Y1 = IQXC-25
CH:D1 CH:D2 = SparkFun-LED
CH:U1 = BQ24230
CH:U2 U1 U2 = MAX40200
DP:U1-DP:U4 = ISL23415
FD1-FD4 = SparkFun-Aesthetics
FP:TP1 PV:TP1 = testpad
FP:U1 = MCP1811AT-012:TT
FP:U2 = ICE40UP5K
J1 = SparkFun-Connectors; PROD_ID: CONN-11443; SF_ID: PRT-08612
J2 J3 = SparkX
J4 = DF40FC-20DP-0.4V(51)
J5 = SparkFun-Connectors
MP:S1 = EVPAYG0BA
MP:U1 = MKL03Z32VFK4R
MP:U2 = AT45D_Flash
MP:Y1 = CM519
PV:C1-PV:C7 = CPX3225A752D
PV:C8 = CPX3225A752D; SPICEPREFIX: C
PV:C9 PV:C10 = SparkFun-Passives; PN: C0805C475K9RACTU
PV:C11 = SparkFun-Passives; PN: 02016D104KAT2A
PV:C12 = SparkFun-Passives; PN: GRM188R71H103KA01D
PV:C13 = SparkFun-Passives; PN: JMK212BJ226KG-T
PV:L1 = EMCComponents (rev19c); WE-NUMBER: 744031220/22uH
PV:L2 = EMCComponents (rev19c); WE-NUMBER: 744029100/10uH
PV:U1 = BQ25570
RG:L1 = EMCComponents (rev19c); WE-NUMBER: 744025002/2,2uH
RG:U1 = TPS6274x
RT:U1 = Micro Crystal RTC
S1 S2 = CHS_SWITCH
SA:U1 = ADXL362
SA:U2 = BMX055
SA:U3 = SparkFun-Sensors; PROD_ID: IC-13607
SA:U4 = BME680
SA:U5 = TCS3772
SB:U1 = MMA8451Q
SB:U2 = L3GD20H
SB:U3 = SI7021
SB:U4 = MAG3110
SB:U5 = LPS25H
SB:U6 = SI4705
SB:U7 = HDC1000
USB:U1 = MOLEX MICRO USB

## Nets
ADXL362_SPI_CS: MP:U1.P$15 SA:U1.P$8
BAT: CH:C3.1 CH:U1.2 CH:U1.3 J1.2
BGX13S_!RST: BT:U1.44 J4.P$7 MP:U1.P$7
BOOST_VBAT: PV:C1.+ PV:C2.+ PV:C3.+ PV:C4.+ PV:C5.+ PV:C6.+ PV:C7.+ PV:C8.+ PV:U1.18
BT:N$1: BT:U1.21 BT:Y1.1
BT:N$2: BT:U1.19 BT:Y1.2
BT:N$3: BT:U1.2 BT:U1.3
CH:BQ24230_OUT: CH:C2.1 CH:D1.A CH:D2.A CH:U1.5 CH:U1.10 CH:U1.11 CH:U2.A1
CH:N$1: CH:R2.2 CH:U1.16
CH:N$2: CH:R1.2 CH:U1.12
CH:N$3: CH:R4.1 CH:U1.7
CH:N$4: CH:R3.2 CH:U1.1
CH:N$5: CH:R5.1 CH:U1.9
CH:N$6: CH:D1.C CH:R4.2
CH:N$7: CH:D2.C CH:R5.2
CH:N$8: CH:R6.2 CH:U1.14
CHARGE_VOUT: CH:U2.A2 S2.2
CLK32K: MP:U1.P$21 SB:U6.P$9
FP:CRESET_B: FP:R1.1 FP:U2.F3
FP:ICE40_VCC_PLL: FP:C4.1 FP:C5.1 FP:R2.1 FP:U2.B1 FP:U2.B2
FP:VCC_1V2: FP:C2.1 FP:C3.1 FP:R2.2 FP:TP1.TP FP:U1.1 FP:U2.C2
FPGA_CS: FP:U2.C1 MP:U1.P$13
FPGA_VS: FP:C6.1 FP:C7.1 FP:R1.2 FP:U2.A3 FP:U2.C4 FP:U2.D2 FP:U2.D4 S1.1' S1.2'
GND: BT:C1.2 BT:C2.2 BT:U1.1 BT:U1.4 BT:U1.5 BT:U1.20 BT:U1.31 BT:U1.45 BT:U1.46 BT:U1.47 BT:U1.48 BT:U1.49 BT:U1.50 BT:U1.51 CH:C1.2 CH:C2.2 CH:C3.2 CH:R1.1 CH:R2.1 CH:R3.1 CH:R6.1 CH:U1.4 CH:U1.6 CH:U1.8 CH:U1.15 CH:U1.EP CH:U2.B2 DP:C1.2 DP:C2.2 DP:C3.2 DP:C4.2 DP:U1.9 DP:U2.9 DP:U3.9 DP:U4.9 FP:C1.2 FP:C2.2 FP:C3.2 FP:C4.2 FP:C5.2 FP:C6.2 FP:C7.2 FP:U1.3 FP:U2.B4 FP:U2.E2 J1.1 J2.1 J3.1 J4.P$20 J5.3 J5.5 MP:C1.2 MP:C2.2 MP:C3.2 MP:C4.2 MP:C5.2 MP:R4.2 MP:S1.B MP:S1.B' MP:U1.P$4 MP:U1.P$PAD MP:U2.7 MP:U2.9 PV:C1.- PV:C2.- PV:C3.- PV:C4.- PV:C5.- PV:C6.- PV:C7.- PV:C8.- PV:C9.2 PV:C10.2 PV:C11.2 PV:C12.2 PV:C13.2 PV:R2.1 PV:R5.1 PV:R7.1 PV:U1.1 PV:U1.5 PV:U1.9 PV:U1.15 PV:U1.17 PV:U1.21 RG:C1.2 RG:C2.2 RG:R1.1 RG:R2.1 RG:R3.1 RG:R4.1 RG:R5.1 RG:U1.3 RT:C1.2 RT:U1.4 RT:U1.5 SA:C1.2 SA:C2.2 SA:C3.2 SA:C4.2 SA:C5.2 SA:C6.2 SA:C7.2 SA:C8.2 SA:C9.2 SA:U1.P$12 SA:U1.P$13 SA:U1.P$16 SA:U2.P$4 SA:U2.P$6 SA:U2.P$12 SA:U2.P$17 SA:U2.P$20 SA:U3.1 SA:U3.7 SA:U3.EP SA:U4.1 SA:U4.7 SA:U5.P$3 SB:C1.2 SB:C2.2 SB:C3.2 SB:C4.2 SB:C5.2 SB:C6.2 SB:C7.2 SB:C8.2 SB:C9.2 SB:C10.2 SB:C11.2 SB:C12.2 SB:C13.2 SB:C14.2 SB:C15.2 SB:C16.2 SB:C17.2 SB:C18.2 SB:U1.P$5 SB:U1.P$7 SB:U1.P$10 SB:U1.P$12 SB:U2.P$4 SB:U2.P$9 SB:U2.P$10 SB:U2.P$11 SB:U2.P$12 SB:U2.P$13 SB:U2.P$15 SB:U3.P$2 SB:U4.P$5 SB:U4.P$10 SB:U5.P$3 SB:U5.P$5 SB:U5.P$8 SB:U5.P$9 SB:U6.P$3 SB:U6.P$6 SB:U6.P$12 SB:U6.P$21 SB:U7.B2 U1.B2 U2.B2 USB:C1.2 USB:C2.2 USB:U1.GND USB:U1.S1 USB:U1.S2 USB:U1.S3 USB:U1.S4 USB:U1.S5 USB:U1.S6
I2C0_SCL/UART_TX: BT:U1.14 J4.P$5 MP:U1.P$17 RT:U1.8
I2C0_SDA/UART_RX: BT:U1.13 J4.P$6 MP:U1.P$18 RT:U1.1
I2C1_SCL: DP:U1.6 FP:U2.A4 J3.4 J4.P$1 SA:U2.P$9 SA:U3.10 SA:U4.4 SA:U5.P$2
I2C1_SDA: DP:U3.6 FP:U2.F4 J3.3 J4.P$2 SA:U2.P$11 SA:U3.9 SA:U4.3 SA:U5.P$6
I2C2_SCL: DP:U2.6 FP:U2.A2 J2.4 J4.P$3 SB:U1.P$4 SB:U2.P$2 SB:U3.P$6 SB:U4.P$7 SB:U5.P$2 SB:U6.P$7 SB:U7.A1
I2C2_SDA: DP:U4.6 FP:U2.A1 J2.3 J4.P$4 SB:U1.P$6 SB:U2.P$3 SB:U3.P$1 SB:U4.P$6 SB:U5.P$4 SB:U6.P$8 SB:U7.A2
ISL23415_SPI_CS: DP:U1.4 DP:U2.4 DP:U3.4 DP:U4.4 J4.P$16 MP:U1.P$20
MP:AT45DB321F_SPI_CS: MP:U1.P$16 MP:U2.4
MP:EXTAL0: MP:C3.1 MP:U1.P$5 MP:Y1.P$1
MP:N$4: MP:R1.1 MP:U2.5
MP:XTAL0: MP:C4.1 MP:U1.P$6 MP:Y1.P$2
PV:LBOOST: PV:L1.2 PV:U1.20
PV:LBUCK: PV:L2.1 PV:U1.16
PV:OK_HYST: PV:R3.1 PV:R4.2 PV:U1.10
PV:OK_PROG: PV:R4.1 PV:R5.2 PV:U1.11
PV:VBAT_OV: PV:R1.1 PV:R2.2 PV:U1.7
PV:VOUT_SET: PV:R6.1 PV:R7.2 PV:U1.12
PV:VRDIV: PV:R1.2 PV:R3.2 PV:R6.2 PV:U1.8
PV:VREF_SAMP: PV:C12.1 PV:U1.4
PV:VSTOR: PV:C10.1 PV:C11.1 PV:U1.3 PV:U1.6 PV:U1.19
PV_VIN: J4.P$15 PV:C9.1 PV:L1.1 PV:U1.2
PV_VOUT: PV:C13.1 PV:L2.2 PV:TP1.TP PV:U1.14 S2.1
REG_CTRL: MP:U1.P$19 RG:R5.2 RG:U1.4
REG_LOAD: RG:U1.6 U1.A1
REG_VIN: FP:C1.1 FP:U1.2 RG:C1.1 RG:U1.1 RG:U1.12 S2.1' S2.2'
REG_VSEL1: MP:U1.P$1 RG:R1.2 RG:U1.11
REG_VSEL2: MP:U1.P$2 RG:R2.2 RG:U1.10
REG_VSEL3: MP:U1.P$9 RG:R3.2 RG:U1.9
REG_VSEL4: MP:U1.P$10 RG:R4.2 RG:U1.8
RG:SW: RG:L1.1 RG:U1.2
RT:N$3: RT:R1.1 RT:U1.7
RTC_!INT!/RESET_B: J4.P$10 J5.10 MP:R3.1 MP:S1.A MP:S1.A' MP:U1.P$23 RT:R2.1 RT:U1.6
SA:N$7: SA:U3.4 SA:U3.5
SB:CAP: SB:C6.1 SB:U2.P$14
SB:N$1: SB:C3.1 SB:U1.P$2
SB:N$2: SB:C11.1 SB:U4.P$4
SB:N$17: SB:C12.1 SB:U4.P$1
SB:SI4705_FMI: SB:U6.P$2
SI4705_!RST: J4.P$17 MP:U1.P$14 SB:U6.P$5
SPI_MISO/UART_RTS: BT:U1.16 DP:U1.2 DP:U2.2 DP:U3.2 DP:U4.2 FP:U2.F1 J4.P$12 MP:U1.P$11 MP:U2.1 SA:U1.P$7
SPI_MOSI/UART_CTS: BT:U1.15 DP:U1.3 DP:U2.3 DP:U3.3 DP:U4.3 FP:U2.E1 J4.P$13 MP:U1.P$8 MP:U2.8 SA:U1.P$6
SPI_SCK: DP:U1.1 DP:U2.1 DP:U3.1 DP:U4.1 FP:U2.D1 J4.P$11 MP:U1.P$12 MP:U2.2 SA:U1.P$4
SWD_CLK: J4.P$9 J5.4 MP:R4.1 MP:U1.P$22
SWD_DIO: J4.P$8 J5.2 MP:R2.1 MP:U1.P$24
USB:VBUS: USB:FB1.2 USB:U1.VBUS
USB_5V: CH:C1.1 CH:U1.13 J4.P$14 USB:C1.1 USB:C2.1 USB:FB1.1
VCC_QIIC: J2.2 J3.2 U2.A1
VS1: J4.P$18 J5.1 MP:C1.1 MP:C2.1 MP:C5.1 MP:R1.2 MP:R2.2 MP:R3.2 MP:U1.P$3 MP:U2.3 MP:U2.6 RG:C2.1 RG:L1.2 RG:U1.5 RT:C1.1 RT:R1.2 RT:R2.2 RT:U1.3 S1.1
VS2: BT:C1.1 BT:C2.1 BT:U1.22 BT:U1.24 DP:C1.1 DP:C2.1 DP:C3.1 DP:C4.1 DP:U1.5 DP:U1.8 DP:U1.10 DP:U2.5 DP:U2.8 DP:U2.10 DP:U3.5 DP:U3.8 DP:U3.10 DP:U4.5 DP:U4.8 DP:U4.10 J4.P$19 S1.2 SA:C1.1 SA:C2.1 SA:C3.1 SA:C4.1 SA:C5.1 SA:C6.1 SA:C7.1 SA:C8.1 SA:C9.1 SA:U1.P$1 SA:U1.P$14 SA:U2.P$3 SA:U2.P$7 SA:U2.P$13 SA:U3.2 SA:U3.6 SA:U4.2 SA:U4.5 SA:U4.6 SA:U4.8 SA:U5.P$1 SB:C1.1 SB:C2.1 SB:C4.1 SB:C5.1 SB:C7.1 SB:C8.1 SB:C9.1 SB:C10.1 SB:C13.1 SB:C14.1 SB:C15.1 SB:C16.1 SB:C17.1 SB:C18.1 SB:U1.P$1 SB:U1.P$14 SB:U2.P$1 SB:U2.P$5 SB:U2.P$16 SB:U3.P$5 SB:U4.P$2 SB:U4.P$8 SB:U5.P$1 SB:U5.P$6 SB:U5.P$10 SB:U6.P$10 SB:U6.P$11 SB:U7.B1 SB:U7.C1 SB:U7.D1 U1.A2 U2.A2

## Tracks (layer width: path | path; a pad name or v marks a point on that pad's centre or on a via)
ADXL362_SPI_CS  (via drill 0.2)
  Top 0.152: MP:U1.P$15 24.13,30.48 v24.38,30.23
  Route4 0.152: v24.38,30.23 24,30.23 19.94,26.16 v19.94,25.91
  Bottom 0.152: v19.94,25.91 19.01,25.91 17.96,26.96 SA:U1.P$8
ANT_CLEAR
  cutout Bottom: 31.76,0.23 36.76,0.23 36.76,1.23 32.77,1.23 32.77,1.93 36.76,1.93 36.76,4.13 31.76,4.13 31.76,1.93 32.09,1.93 32.09,1.23 31.76,1.23
  cutout Top: 31.76,0.23 36.76,0.23 36.76,1.23 32.77,1.23 32.77,1.93 36.76,1.93 36.76,4.13 31.76,4.13 31.76,1.93 32.09,1.93 32.09,1.23 31.76,1.23
  cutout Route3: 31.76,0.23 36.76,0.23 36.76,1.23 32.77,1.23 32.77,1.93 36.76,1.93 36.76,4.13 31.76,4.13 31.76,1.93 32.09,1.93 32.09,1.23 31.76,1.23
  cutout Route4: 31.76,0.23 36.76,0.23 36.76,1.23 32.77,1.23 32.77,1.93 36.76,1.93 36.76,4.13 31.76,4.13 31.76,1.93 32.09,1.93 32.09,1.23 31.76,1.23
  cutout Route2: 31.76,0.23 36.76,0.23 36.76,1.23 32.77,1.23 32.77,1.93 36.76,1.93 36.76,4.13 31.76,4.13 31.76,1.93 32.09,1.93 32.09,1.23 31.76,1.23
  cutout Route5: 31.76,0.23 36.76,0.23 36.76,1.23 32.77,1.23 32.77,1.93 36.76,1.93 36.76,4.13 31.76,4.13 31.76,1.93 32.09,1.93 32.09,1.23 31.76,1.23
  cutout Route15: 31.76,0.23 36.76,0.23 36.76,1.23 32.77,1.23 32.77,1.93 36.76,1.93 36.76,4.13 31.76,4.13 31.76,1.93 32.09,1.93 32.09,1.23 31.76,1.23
  cutout Route14: 31.76,0.23 36.76,0.23 36.76,1.23 32.77,1.23 32.77,1.93 36.76,1.93 36.76,4.13 31.76,4.13 31.76,1.93 32.09,1.93 32.09,1.23 31.76,1.23
  cutout Route7: 31.76,0.23 36.76,0.23 36.76,1.23 32.77,1.23 32.77,1.93 36.76,1.93 36.76,4.13 31.76,4.13 31.76,1.93 32.09,1.93 32.09,1.23 31.76,1.23
  cutout Route6: 31.76,0.23 36.76,0.23 36.76,1.23 32.77,1.23 32.77,1.93 36.76,1.93 36.76,4.13 31.76,4.13 31.76,1.93 32.09,1.93 32.09,1.23 31.76,1.23
BAT  (via drill 0.6)
  Top 0.152: CH:U1.2 2.27,21.32 v1.4,20.45 1.4,19.01 CH:C3.1
  Top 0.254: CH:U1.2 CH:U1.3
  Bottom 0.406: J1.2 4.26,17.58 v1.4,20.45
  pour Top (isolate 0.254): 4.32,21.34 0.76,21.34 0.76,19.18 1.91,19.18 1.91,19.81 2.92,20.83 4.32,20.83
BGX13S_!RST  (via drill 0.2)
  Top 0.152: MP:U1.P$7 20.25,28.88 v19.56,28.19 | J4.P$7 13.14,36.65 13.14,36.99 13.54,37.39 16.71,37.39 17.02,37.08 17.02,36.32 17.78,35.56 17.78,34.67 18.29,34.16 18.92,34.16 v19.56,33.53
  Route4 0.152: v19.56,28.19 v19.56,33.53
  Route7 0.152: v19.56,28.19 18.92,27.56 18.92,20.45 26.04,13.34 26.04,6.48 28.32,4.19 29.46,4.19 30.48,3.17 v30.48,2.54
  Bottom 0.152: BT:U1.44 31.27,2.54 v30.48,2.54
BOOST_VBAT  (via drill 0.65)
  Top 0.254: PV:U1.18 17.78,9.27 v18.29,9.78
  Top 0.406: PV:C1.+ PV:C8.+ 6.52,12.06 | PV:C2.+ PV:C5.+ | PV:C6.+ PV:C3.+ | PV:C4.+ PV:C7.+ PV:C6.+ | PV:C5.+ PV:C6.+ | v9.78,12.06 6.52,12.06 | PV:C5.+ 6.52,12.06
  Route7 0.406: v9.78,12.06 16,12.06 v18.29,9.78
BT:N$1
  Bottom 0.152: BT:Y1.1 27.37,8.07 27.82,7.61 27.82,7.19 BT:U1.21
BT:N$2
  Bottom 0.152: BT:U1.19 26.01,6.57 BT:Y1.2
BT:N$3
  Bottom 0.152: BT:U1.2 BT:U1.3
CH:BQ24230_OUT
  Top 0.127: 9.49,21.77 CH:U2.A1
  Top 0.152: CH:C2.1 8.93,21.2 | CH:C2.1 9.28,21.2 10.03,20.45 10.03,18.86 CH:D2.A 9.31,17.95 8.38,17.02 4.46,17.02 CH:D1.A 3.34,18.18 CH:U1.5 | CH:C2.1 8.69,21.32 CH:U1.11 CH:U1.10
  Top 0.406: 9.49,21.77 8.93,21.2
CH:N$1
  Top 0.152: CH:R2.2 3.18,24.11 CH:U1.16
CH:N$2
  Top 0.152: CH:U1.12 7,21.84 7.75,21.84 8.15,22.25 CH:R1.2
CH:N$3
  Top 0.152: CH:U1.7 5.75,17.91 CH:R4.1
CH:N$4
  Top 0.152: CH:U1.1 3.37,21.82 2.85,22.34 CH:R3.2
CH:N$5
  Top 0.152: CH:R5.1 7.4,18.65 7.75,19 7.75,20.19 7.62,20.32 CH:U1.9
CH:N$6
  Top 0.152: CH:R4.2 3.37,16.35 CH:D1.C
CH:N$7
  Top 0.152: CH:R5.2 7.43,16.38 CH:D2.C
CH:N$8
  Top 0.152: CH:U1.14 5.75,23.23 5.13,23.84 5.13,25.89 CH:R6.2
CHARGE_VOUT
  Top 0.127: CH:U2.A2 10.59,22.53
  Top 0.406: 10.59,22.53 11.18,23.11 S2.2
  pour Top (isolate 0.254): 6.6,20.83 9.44,20.83 9.44,21.59 8.13,21.59 7.87,21.34 6.6,21.34
CLK32K  (via drill 0.2)
  Top 0.152: MP:U1.P$21 21.97,33.52 v22.1,33.66
  Route4 0.152: v22.1,33.66 22.1,29.84 18.16,25.91 v18.16,25.4
  Route7 0.152: v24.26,12.19 23.37,12.19 20.07,15.49 20.07,16.76 18.16,18.67 v18.16,25.4
  Bottom 0.152: SB:U6.P$9 22.3,7.8 20.7,9.4 20.7,11.3 21.59,12.19 v24.26,12.19
FP:CRESET_B
  Top 0.127: FP:U2.F3 29.14,19.51 FP:R1.1
FP:ICE40_VCC_PLL
  Top 0.152: FP:U2.B2 FP:U2.B1 32.6,20.38 32.6,20.45 34.04,21.89 34.04,23.13 FP:R2.1
  Top 0.406: FP:R2.1 35.42,21.75 FP:C5.1 FP:C4.1
FP:VCC_1V2  (via drill 0.1 layers 1-2, 0.2)
  Top 0.127: 26.42,22.99 26.43,22.97
  Top 0.152: FP:TP1.TP 33.99,24.86 32.62,23.5 FP:R2.2 | v31.88,21.78 31.37,22.29 31.37,22.97
  Top 0.406: 25.4,24.62 25.4,24 26.42,22.99 | 26.43,22.97 FP:C2.1 FP:C3.1 31.37,22.97 31.64,23.24 FP:R2.2
  Top 0.61: FP:U1.1 25.4,24.62
  Route2 0.152: FP:U2.C2 32.13,21.53 v31.88,21.78
  other vias: 32.13,19.91
FPGA_CS  (via drill 0.2)
  Top 0.152: MP:U1.P$13 24.6,28.45 v24.64,28.45 | FP:U2.C1 32.13,20.95 v32.64,21.46
  Route4 0.152: v24.64,28.45 25.53,27.56 28.96,27.56 32.64,23.88 v32.64,21.46
FPGA_VS  (via drill 0.1 layers 1-2, 0.2)
  Top 0.127: 34.16,18.92 34.16,17.8 34.14,17.77
  Top 0.152: FP:U2.A3 33.57,19.51 34.16,18.92 | v32.13,17.91 32.13,17.16 FP:C7.1
  Top 0.2: FP:U2.C4 FP:U2.D4
  Top 0.406: S1.2' S1.1' 34.14,17.77 32.89,16.52 FP:C7.1 FP:C6.1 27.8,18.19 FP:R1.2
  Route2 0.127: v32.13,17.91 31.73,18.31 FP:U2.D4 FP:U2.D2
  other vias: 31.73,19.91 31.73,19.11
GND  (via drill 0.1 layers 1-2, 0.2, 0.35, 0.65)
  Top 0.15: MP:U1.P$PAD 21.47,30.48 MP:U1.P$4 19.05,30.48 v18.92,30.61
  Top 0.152: PV:U1.17 v18.29,7.11 | PV:U1.9 18.28,6.09 | 18.28,6.09 v18.29,6.1 | CH:R6.1 1.54,26.27 v1.4,26.42 | PV:U1.1 16.91,7.6 17.08,7.43 | 17.08,7.43 17.14,7.37 17.14,7.24 | 17.14,7.24 v17.27,7.11 | PV:U1.5 16.91,5.6 17.14,5.84 17.14,7.24 | PV:U1.15 18.78,7.6 v18.29,7.11 | PV:U1.21 17.08,7.3 17.08,7.43 | PV:U1.21 v18.29,7.11 | 18.28,6.09 v18.28,6.1 PV:U1.21 | RG:R4.1 23.28,17.56 v24.13,18.41 | J4.P$20 14.27,33.44 14.46,33.25 15.72,33.25 15.75,33.27 | CH:U1.4 4.57,20.32 4.89,20.64 4.95,20.57 | 4.95,20.57 v5.08,20.7 5.45,21.07 CH:U1.EP | CH:U1.15 5.25,21.63 v5.08,21.46 | v6.48,18.54 6.25,18.77 CH:U1.8 | CH:U1.6 5.25,20.28 4.95,20.57 | v24,3.81 24,4.45 22.34,6.11 PV:R7.1 | MP:C2.2 15.75,33.27 | 15.75,33.27 15.75,33.78 v15.49,34.04 | USB:C2.2 USB:C1.2 | CH:C2.2 8.8,18.96 v8.38,18.54 | J5.3 J5.5 36.7,34.42 35.31,35.81 v34.67,35.81
  Route2 0.152: FP:U2.B4 32.53,18.27 v33.02,17.78
  Bottom 0.152: DP:U4.9 29.78,22.67 v28.96,21.84 | SB:U5.P$3 2.58,7.27 3.17,7.87 v3.3,7.87 | v10.29,12.95 10.95,12.29 SB:U1.P$7 | SB:U6.P$3 21.8,5.59 SB:U6.P$21 22.8,6.59 SB:U6.P$12 | SB:U6.P$6 20.79,7.29 v20.46,7.62 v20.45,7.62 | SA:C2.2 SA:C1.2 | DP:C4.2 v34.16,25.65 33.76,26.06 SB:U4.P$10
  other vias: 32.53,19.11 13.21,1.02 16.13,9.65 26.67,0.89 37.21,4.7 37.21,1.52 34.42,4.7 28.32,3.05 32.38,8.26 28.19,6.35 35.81,4.7 23.11,36.2 4.57,18.54 11.18,4.19 1.27,4.19 4.95,0.89 4.95,7.37 25.78,30.73 27.3,30.73 28.83,30.73 25.78,29.46 28.83,29.46 25.78,28.19 27.3,28.19 28.83,28.19 30.48,31.11 27.94,36.83 15.24,18.67 28.19,20.7 27.94,33.91 12.06,25.65 26.04,20.57 20.57,17.14 7.49,24.38 20.32,23.24 26.29,24.77 16.64,33.4 15.11,5.59 18.16,3.81 17.27,6.1 28.83,24.77 36.2,27.69 15.37,24.38 5.97,21.46 5.97,20.7 21.21,10.16 20.95,26.04 5.59,27.81 36.2,15.62 29.84,11.43 17.78,6.6 26.54,30.1 28.07,29.97 26.54,28.83 28.07,28.83 27.3,29.46 30.35,6.35 32.13,5.84 11.05,6.86 10.67,30.1 31.33,19.91
  pour Route2: 0,38.1 38.1,38.1 38.1,0 0,0
  pour Route15: 0,0 38.1,0 38.1,38.1 0,38.1
  pour Route6: 0,38.1 38.1,38.1 38.1,0 0,0
  pour Top (rank 2): 0,0 38.1,0 38.1,38.1 0,38.1
  pour Route3: 0,0 38.1,0 38.1,38.1 0,38.1
  pour Route7: 0,0 38.1,0 38.1,38.1 0,38.1
  pour Bottom: 0,0 0,38.1 38.1,38.1 38.1,0
I2C0_SCL/UART_TX  (via drill 0.2)
  Top 0.152: RT:U1.8 33.81,26.19 v33.27,25.65 | MP:U1.P$17 23.95,31.48 24.21,31.75 v24.51,31.75 | J4.P$5 12.27,35.36 v12.95,34.67 | v25.4,3.94 24.89,4.45 24.89,6.99 26.04,8.13 26.04,10.03 28.45,12.45 v29.08,12.45
  Route4 0.152: v24.51,31.75 25.02,31.24 29.21,31.24 29.72,30.73 29.72,29.21 v33.27,25.65 35.18,23.75 v36.45,23.75
  Route7 0.152: v24.51,31.75 19.26,31.75 18.69,31.19 16.69,31.19 13.21,34.67 v12.95,34.67
  Bottom 0.152: v36.45,23.75 36.45,21.84 35.18,20.57 35.18,17.27 35.69,16.76 35.69,15.37 35.18,14.86 35.18,13.59 34.04,12.45 v29.08,12.45 | v25.4,3.94 25.53,4.07 BT:U1.14
I2C0_SDA/UART_RX  (via drill 0.2)
  Top 0.15: 12.67,35.98 12.67,35.97 v13.97,34.67
  Top 0.152: MP:U1.P$18 24.09,32.51 v24.38,32.51 | J4.P$6 12.67,35.98 | v28.45,12.95 25.65,10.16 25.65,8.26 24.51,7.11 24.51,4.06 v25.4,3.17 | RT:U1.1 35.94,26.29 v35.94,25.65
  Route4 0.152: v24.38,32.51 25.27,32.51 26.16,31.62 32.64,31.62 34.67,29.59 34.67,26.92 v35.94,25.65
  Route7 0.152: v13.97,34.67 16.13,32.51 v24.38,32.51
  Bottom 0.152: v35.94,25.65 35.94,21.97 34.8,20.83 34.8,17.14 35.31,16.64 35.31,15.62 34.8,15.11 34.8,13.84 33.91,12.95 v28.45,12.95 | v25.4,3.17 25.79,3.57 BT:U1.13
I2C1_SCL  (via drill 0.2)
  Top 0.15: J4.P$1 10.67,37.08 10.41,37.34 10.03,37.34 8.64,35.94
  Top 0.152: FP:U2.A4 33.21,19.11 v33.53,18.8 | 8.64,35.94 v8.64,32.13
  Route4 0.152: v14.73,19.18 13.72,20.19 v13.72,21.46 v12.19,21.46 | v20.7,21.97 22.86,21.97 v25.65,19.18 | v8.64,32.13 8.64,31.37 9.78,30.23 9.78,29.46 10.54,28.7 10.54,26.92 8.26,24.64 v8.26,23.88 | v29.08,18.03 29.08,18.79 29.59,19.3 30.57,19.3 31.08,18.8 v33.53,18.8 35.43,18.8 37.47,16.76 37.47,15.62 v37.08,15.24
  Route7 0.152: v35.31,35.05 35.69,34.67 35.69,27.3 37.47,25.53 37.47,15.62 v37.08,15.24
  Bottom 0.152: SA:U3.10 13.94,17.53 13.94,18.39 v14.73,19.18 21.21,19.18 | 21.21,19.18 v25.65,19.18 27.94,19.18 v29.08,18.04 v29.08,18.03 | SA:U5.P$2 22.78,16.21 21.21,17.78 21.21,19.18 | SA:U4.4 13.79,21.53 v13.72,21.46 | SA:U2.P$9 20.73,21.95 v20.7,21.97 | v12.19,21.46 10.06,23.6 8.53,23.6 v8.26,23.88 5.84,23.88 4.45,25.27 4.45,26.21 DP:U1.6 | J3.4 35.79,33.02 35.79,34.57 v35.31,35.05
I2C1_SDA  (via drill 0.2)
  Top 0.15: J4.P$2 11.07,36.24 10.77,35.94
  Top 0.152: FP:U2.F4 30.54,19.11 v30.1,18.67 | 10.77,35.94 9.53,35.94 9.27,35.69 v9.27,33.27
  Route4 0.152: v26.42,19.68 v26.42,18.54 | v9.78,24.13 9.78,25.27 10.92,26.42 10.92,28.96 10.16,29.72 10.16,30.61 9.27,31.5 v9.27,33.27 | v36.83,16.26 35.94,17.14 30.73,17.14 30.1,17.78 v30.1,18.67
  Route7 0.152: v34.67,34.67 34.67,27.69 37.08,25.27 37.08,16.51 v36.83,16.26
  Bottom 0.152: SA:U3.9 13.75,16.86 12.95,17.65 12.95,19.68 | 12.95,19.68 21.97,19.68 | 21.97,19.68 v26.42,19.68 29.08,19.68 v30.1,18.67 | SA:U4.3 13.79,22.33 12.95,21.5 | 12.95,21.5 12.94,21.48 10.29,24.13 v9.78,24.13 9.65,24.13 8.62,25.16 DP:U3.6 | 12.95,21.5 12.95,19.68 | SA:U2.P$11 22.03,19.75 21.97,19.68 | J3.3 v34.66,34.66 v34.67,34.67 | v26.42,18.54 27.3,17.65 27.3,15.75 26.8,15.24 26.16,15.24 25.85,15.56 SA:U5.P$6
I2C2_SCL  (via drill 0.2)
  Top 0.15: FP:U2.A2 32.95,19.94 v33.91,19.94
  Top 0.152: J4.P$3 11.47,36.11 v10.67,35.31
  Route4 0.15: v33.91,19.94 34.43,19.94 37.49,23
  Route4 0.152: v5.08,9.4 5.59,8.89 v5.59,4.32 | v19.68,10.29 20.07,9.91 v20.07,8.64 | v14.1,7.24 v14.1,8.51 | v10.67,35.31 11.18,35.81 15.24,35.81 15.62,36.2 21.21,36.2 22.38,37.36 25.63,37.36 26.92,36.07 31.37,36.07 35.43,32 35.43,27.57 37.49,25.52 37.49,23
  Route7 0.152: v29.59,14.05 27.86,14.05 v27.18,14.73
  Bottom 0.152: 3.81,9.4 1.65,7.24 1.65,5.88 1.89,5.63 SB:U5.P$2 | 3.81,9.4 v5.08,9.4 11.29,9.4 11.34,9.34 | v5.59,4.32 6.89,5.62 SB:U2.P$2 | 33.91,19.89 v33.91,19.94 | 33.91,19.89 32.81,18.8 31.5,18.8 31.24,18.54 | 33.91,19.89 33.93,19.92 33.4,20.45 33.4,21.21 34.96,22.77 SB:U4.P$7 | 31.24,18.54 27.43,14.73 v27.18,14.73 24,14.73 22.73,13.46 20.7,13.46 19.68,12.45 v19.68,10.29 19.68,9.91 18.29,8.51 v14.1,8.51 12.18,8.51 11.34,9.34 | v20.07,8.64 20.19,8.64 21.3,7.53 SB:U6.P$7 | v14.1,7.24 13.97,7.11 13.97,6.19 13.63,5.85 SB:U7.A1 | DP:U2.6 28.31,21.48 31.24,18.54 | J2.4 29.84,13.8 v29.59,14.05 | SB:U1.P$4 12.18,10.18 11.34,9.34 | SB:U3.P$6 4.32,9.91 3.81,9.4
I2C2_SDA  (via drill 0.2)
  Top 0.152: FP:U2.A1 33.27,20.31 v33.91,20.95 | J4.P$4 11.87,35.62 v11.43,35.18
  Route4 0.152: v10.03,10.54 9.65,10.16 v9.65,8.89 | v1.52,8.38 v4.95,8.38 | v33.91,20.95 33.91,21.34 v33.27,21.97 35.94,21.97 37.08,23.11 37.08,25.4 35.05,27.43 35.05,31.75 31.11,35.69 26.67,35.69 25.4,36.96 22.61,36.96 21.46,35.81 15.88,35.81 15.24,35.18 v11.43,35.18
  Bottom 0.152: 6.35,8.89 v9.65,8.89 11.18,8.89 12.06,8 13.4,8 | 6.35,8.89 5.46,8.89 v4.95,8.38 3.17,6.6 SB:U5.P$4 | 13.4,8 18.41,8 19.94,9.53 | 19.94,9.53 20.27,9.86 20.27,12.53 20.83,13.08 22.86,13.08 24,14.22 27.56,14.22 29.27,15.94 | 29.27,15.94 31.75,18.41 32.77,18.41 32.89,18.29 34.04,18.29 34.42,18.67 34.42,20.45 v33.91,20.95 35.36,22.41 SB:U4.P$6 | 19.94,9.53 21.8,7.67 SB:U6.P$8 | DP:U4.6 32.75,22.49 v33.27,21.97 | J2.3 30.41,14.8 29.27,15.94 | 6.35,8.89 6.35,6.73 6.94,6.14 7.67,6.14 SB:U2.P$3 | v1.52,8.38 1.52,10.28 SB:U3.P$1 | SB:U7.A2 13.37,7.97 13.4,8 | v10.03,10.54 11.29,11.79 SB:U1.P$6
ISL23415_SPI_CS  (via drill 0.2)
  Top 0.152: MP:U1.P$20 22.47,33.13 v22.99,33.66 | v9.91,28.45 11.05,28.45 12.68,30.07 12.68,30.71 v12.7,30.73 12.67,30.77 J4.P$16
  Route4 0.152: v5.97,28.45 v9.91,28.45 | v12.7,30.73 12.72,30.76 13.03,30.76 16.3,34.04 v17.27,34.04
  Route7 0.152: v17.27,34.04 17.53,34.29 20.32,34.29 21.46,33.15 22.48,33.15 v22.99,33.66 23.5,33.15 24.64,33.15 25.65,32.13 28.7,32.13 29.72,31.11 29.72,24.64 | v29.08,24 29.72,24.64 | 29.72,24.64 29.97,24.89 v32.77,24.89
  Bottom 0.152: v5.97,28.45 4.7,28.45 4.43,28.18 DP:U1.4 | v9.91,28.45 9.45,28.45 DP:U3.4 | v29.08,24 28.37,24 DP:U2.4 | v32.77,24.89 32.77,24.08 DP:U4.4
MP:AT45DB321F_SPI_CS  (via drill 0.2)
  Top 0.152: MP:U1.P$16 v24.26,30.99 | MP:U2.4 29.81,26.76 30.23,27.18 v30.23,30.35
  Bottom 0.152: v30.23,30.35 29.08,31.5 25.4,31.5 24.89,30.99 v24.26,30.99
MP:EXTAL0
  Top 0.152: MP:U1.P$5 18.47,29.98 18.22,30.24 14.97,30.24 13.46,28.73 MP:Y1.P$1 13.32,28.43 MP:C3.1
MP:N$4
  Top 0.152: MP:R1.1 30.61,34.27 29.72,33.39 29.72,32.67 MP:U2.5
MP:XTAL0
  Top 0.152: MP:U1.P$6 19.36,29.48 18.45,28.57 MP:Y1.P$2 17.8,28.44 MP:C4.1
PV:LBOOST
  Top 0.254: PV:U1.20 15.8,8.33
  Top 0.406: 15.8,8.33 14.86,9.27 14.86,12.3 PV:L1.2
PV:LBUCK
  Top 0.254: PV:U1.16 20.49,10.04 20.49,12.19 PV:L2.1
PV:OK_HYST
  Top 0.152: PV:U1.10 18.78,2.92 PV:R3.1 18.81,2.41 19.05,2.41 20.08,1.38 PV:R4.2
PV:OK_PROG
  Top 0.152: PV:U1.11 19.5,3.62 PV:R4.1 20.72,2.41 PV:R5.2
PV:VBAT_OV
  Top 0.127: PV:R1.1 PV:R2.2
  Top 0.152: PV:U1.7 17.28,4.45 16.38,3.56 PV:R1.1
PV:VOUT_SET
  Top 0.152: PV:U1.12 PV:R7.2 20.84,6.1 PV:R6.1
PV:VRDIV  (via drill 0.2)
  Top 0.152: PV:R6.2 20.34,4.19 v20.21,4.06 | PV:U1.8 17.8,4.86 17.8,4.32 17.55,4.07 v17.55,3.18 v17.55,3.17 17.55,1.38 | PV:R1.2 17.55,1.38 | 17.55,1.38 PV:R3.2
  Route7 0.15: v17.55,3.18 18.56,3.18 19.45,4.06 v20.21,4.06
PV:VREF_SAMP
  Top 0.152: PV:U1.4 14.87,6.1 13.42,4.66 PV:C12.1
PV:VSTOR  (via drill 0.2)
  Top 0.152: v14.52,6.56 14.56,6.6 PV:U1.3 | v17.27,9.53 v17.28,9.53 | PV:U1.6 16.73,4.83 v15.24,4.83 | PV:C11.1 17.28,11.08 17.28,10.79
  Top 0.254: PV:U1.19 v17.28,9.53 17.28,10.79
  Top 0.305: PV:C10.1 17.26,11.25 PV:C11.1
  Route7 0.15: v15.24,4.83 14.99,4.83 14.48,5.33 14.48,6.52 v14.52,6.56 17.27,9.31 v17.27,9.53
PV_VIN  (via drill 0.65)
  Top 0.152: J4.P$15 12.27,31.06 v11.68,30.48 | 11.56,13.97 11.56,12.6 PV:L1.1
  Top 0.254: PV:C9.1 14.47,7.88 15.25,7.1 PV:U1.2
  Top 0.406: PV:L1.1 11.41,8.92 PV:C9.1 11.18,7.88 10.41,7.12 10.41,2.03 v11.43,1.02 | v11.18,16.26 11.18,14.35 11.56,13.97
  Route4 0.406: v11.18,16.26 10.54,16.89 10.54,25.15 11.43,26.04 11.43,30.23 v11.68,30.48
PV_VOUT  (via drill 0.65)
  Top 0.127: PV:U1.14 19.51,7.11 21.34,7.11 22.95,8.72 PV:C13.1
  Top 0.152: PV:C13.1 PV:TP1.TP
  Top 0.406: PV:L2.2 PV:C13.1 | S2.1 13.46,24.89 v14.48,24.89
  Top 0.61: v24.26,13.21 22.94,13.21 PV:L2.2
  Route4 0.406: v24.26,13.21 24.26,14.35 22.73,15.88 20.7,15.88 14.48,22.1 v14.48,24.89
REG_CTRL  (via drill 0.2)
  Top 0.152: RG:R5.2 22.95,15.11 v18.8,15.11 | RG:U1.4 16.23,18.43 v16.15,18.51 | MP:U1.P$19 24.04,33.66 v24.13,33.66
  Route4 0.152: v16.15,18.51 16.15,17.76 v18.8,15.11
  Route7 0.152: v24.13,33.66 23.5,34.29 21.08,34.29 19.3,36.07 10.41,36.07 8,33.66 8,27.56 9.14,26.42 9.14,22.61 11.68,20.07 14.99,20.07 16.15,18.9 v16.15,18.51
REG_LOAD
  Top 0.127: U1.A1 17.48,16.64 17.48,17.36
  Top 0.15: RG:U1.6 17.48,17.36
  pour Top: 17.02,17.53 17.02,16.76 17.65,16.76 17.65,17.53
REG_VIN
  Top 0.152: RG:U1.1 RG:U1.12
  Top 0.406: FP:U1.2 23.4,24.65 FP:C1.1 18.3,24.65 S2.1'
  pour Top (isolate 0.254): 17.27,19.94 17.27,24.89 19.43,24.89 19.43,19.94
REG_VSEL1  (via drill 0.2)
  Top 0.152: RG:U1.11 19.84,19.43 20.59,20.18 | RG:R1.2 21.52,21.12 20.59,20.18 | MP:U1.P$1 19.87,32 v18.5,33.36 | v20.57,20.19 20.59,20.18
  Route4 0.152: v20.57,20.19 15.08,25.69 15.08,30.19 15.88,30.99 15.88,32.13 16.51,32.77 17.91,32.77 v18.5,33.36
REG_VSEL2  (via drill 0.2)
  Top 0.152: RG:U1.10 20.48,18.93 20.89,19.34 21.46,19.34 | MP:U1.P$2 19.58,31.48 19.25,31.82 v18.48,31.82 | v21.46,20.19 21.46,19.34 | 21.46,19.34 RG:R2.2
  Route4 0.152: v21.46,20.19 17.65,24 17.65,30.99 v18.48,31.82
REG_VSEL3  (via drill 0.2)
  Top 0.152: MP:U1.P$9 21.47,27.3 v21.72,27.05 | RG:U1.9 20.71,18.43 20.95,18.67 v21.72,18.67 | RG:R3.2 25.08,18.48 v25.02,18.54
  Route4 0.152: v21.72,18.67 22.1,19.05 24.51,19.05 v25.02,18.54
  Route7 0.152: v21.72,27.05 22.1,26.67 22.1,19.05 v21.72,18.67
REG_VSEL4  (via drill 0.2)
  Top 0.152: RG:U1.8 20.43,17.93 v20.45,17.91 21.43,17.91 RG:R4.2 | v27.05,20.45 26.55,20.95 26.55,21.71 24.38,23.88 24.38,25.27 21.97,27.69 MP:U1.P$10
  Route4 0.152: v27.05,20.45 27.05,18.29 26.67,17.91 v20.45,17.91
RG:SW
  Top 0.254: RG:U1.2 15.5,19.43 14.9,20.02
  Top 0.305: RG:L1.1 14.9,20.02
RT:N$3
  Top 0.152: RT:U1.7 33.76,28.07 RT:R1.1
RTC_!INT!/RESET_B  (via drill 0.2)
  Top 0.15: MP:R3.1 v20.94,36.96 20.95,36.94 | v20.95,36.96 24.1,36.96 | 24.1,36.96 24.13,36.93 | 24.1,36.96 24.93,36.96 MP:S1.A'
  Top 0.152: MP:U1.P$23 20.95,32.6 20.95,36.94 v20.95,36.96 | 24.13,36.93 v24.13,35.94 24.13,34.42 24.9,33.65 MP:S1.A | MP:S1.A' 25.68,37.39 31.7,37.39 J5.10 | v16.13,36.83 15.11,35.81 14.52,35.81 14.27,36.07 J4.P$10 | RT:U1.6 33.17,29.02 32.86,29.34 v32.38,29.34 31.62,29.34 31.49,29.47 RT:R2.1
  Route4 0.152: v16.13,36.83 16.64,36.83 16.89,36.58 20.57,36.58 v20.95,36.96
  Route7 0.152: v24.13,35.94 28.7,35.94 31.75,32.89 31.75,29.34 v32.38,29.34
SA:N$7
  Bottom 0.152: SA:U3.5 SA:U3.4
SB:CAP
  Bottom 0.152: SB:U2.P$14 9.49,4.24 SB:C6.1
SB:N$1
  Bottom 0.152: SB:U1.P$2 13.19,11.03 SB:C3.1
SB:N$2
  Bottom 0.152: SB:U4.P$4 34.96,28.61 35.18,28.83 36.45,28.83 37.08,29.46 SB:C11.1
SB:N$17
  Bottom 0.15: SB:U4.P$1 33.76,28.81 34.54,29.59 35.18,29.59
  Bottom 0.152: 35.18,29.59 SB:C12.1
SB:SI4705_FMI  (via drill 0.65)
  Bottom 0.152: v22.23,1.02 19.68,3.56 19.68,4.83 19.95,5.09 SB:U6.P$2
SI4705_!RST  (via drill 0.2)
  Top 0.152: MP:U1.P$14 23.86,29.98 v24.38,29.46 | J4.P$17 13.07,31.51 v14.22,30.35
  Route4 0.152: v16,4.19 16,8 v9.91,14.1
  Route7 0.152: v11.43,21.21 11.43,23.75 14.22,26.54 v14.22,30.35 15.88,30.35 16.76,29.46 v24.38,29.46
  Bottom 0.152: SB:U6.P$5 20.18,6.59 18.8,5.21 17.78,5.21 16.76,4.19 v16,4.19 | v11.43,21.21 10.67,20.45 10.67,17.14 9.91,16.38 v9.91,14.1
SPI_MISO/UART_RTS  (via drill 0.2)
  Top 0.152: MP:U1.P$11 22.47,28.08 v23.37,27.18 23.78,26.76 MP:U2.1 | FP:U2.F1 30.61,20.31 v30.1,20.83 | J4.P$12 11.07,32.91 v9.91,31.75 | v31.37,26.04 v28.7,26.04
  Route4 0.152: v25.53,5.46 24.89,6.1 24.89,11.05 28.57,14.73 28.57,19.43 29.97,20.83 v30.1,20.83 30.73,21.46 30.73,24.38 29.08,26.04 v28.7,26.04 28.07,26.67 27.36,26.67 26.8,26.11 v26.8,25.91 24.64,25.91 v23.37,27.18 | v5.97,29.84 6.1,29.97 v9.14,29.97
  Route7 0.152: v23.37,27.18 23.37,26.42 28.96,20.83 v30.1,20.83
  Bottom 0.152: v25.53,5.46 25.92,5.07 BT:U1.16 | SA:U1.P$7 18.01,27.46 18.92,26.54 20.45,26.54 21.59,27.69 | 21.59,27.69 22.86,27.69 v23.37,27.18 | 21.59,27.69 21.59,28.19 21.08,28.7 18.67,28.7 15.34,32.03 10.19,32.03 v9.91,31.75 9.14,30.99 v9.14,29.97 7.62,28.45 DP:U3.2 | DP:U1.2 3.43,28.32 4.95,29.84 v5.97,29.84 | DP:U2.2 27.31,25.4 v26.8,25.91 | DP:U4.2 31.75,24.89 31.37,25.27 v31.37,26.04
SPI_MOSI/UART_CTS  (via drill 0.2)
  Top 0.152: MP:U1.P$8 20.97,27.95 v20.19,27.18 | FP:U2.E1 31.33,20.49 v30.1,21.72 | J4.P$13 11.47,32.3 v10.67,31.5 | v32.26,25.53 32.13,25.4 28.19,25.4 v28.14,25.35 | MP:U2.8 25.4,32.26 v26.04,32.89
  Route4 0.152: v25.4,4.7 24.38,5.71 24.38,11.18 28.07,14.86 28.07,19.68 v30.1,21.72 30.1,24.38 29.08,25.4 28.19,25.4 | v9.27,29.08 v6.48,29.08 | 28.09,25.4 v28.14,25.35 28.19,25.4 | 28.19,25.4 28.09,25.4 | 28.09,25.4 19.43,25.4 19.18,25.65 19.18,26.16 v20.19,27.18 23.62,30.61 23.62,32.77 24,33.15 24.77,33.15 25.02,32.89 v26.04,32.89
  Route7 0.152: v30.1,21.72 24.13,27.69 20.7,27.69 v20.19,27.18
  Bottom 0.152: v25.4,4.7 25.53,4.57 BT:U1.15 | SA:U1.P$6 18.16,27.96 | 18.16,27.96 18.4,27.96 19.18,27.18 v20.19,27.18 | 18.16,27.96 18.16,28.7 15.24,31.62 10.79,31.62 v10.67,31.5 10.03,30.86 10.03,29.84 v9.27,29.08 8.12,27.94 DP:U3.3 | DP:U1.3 3.93,28.19 4.83,29.08 v6.48,29.08 | DP:U2.3 27.81,25.02 v28.14,25.35 | DP:U4.3 v32.25,25.52 v32.26,25.53
SPI_SCK  (via drill 0.2)
  Top 0.152: FP:U2.D1 31.73,20.85 v31.24,21.34 | MP:U1.P$12 23.62,28.23 v23.62,28.19 23.66,28.19 24.29,27.56 25.88,27.56 MP:U2.2 | J4.P$11 10.67,33.1 10.33,32.77 v10.16,32.77
  Route4 0.152: v31.24,21.34 31.24,24.51 28.57,27.18 24.64,27.18 v23.62,28.19 | v16.64,32 16.64,30.61 v15.75,29.72
  Bottom 0.152: DP:U3.1 7.12,30.47 | DP:U1.1 2.93,28.59 4.83,30.48 7.11,30.48 7.12,30.47 | DP:U2.1 26.81,25.01 25.21,26.61 | 25.21,26.61 v23.62,28.19 22.1,28.19 21.21,29.08 18.8,29.08 16.64,31.24 v16.64,32 16.26,32.38 10.54,32.38 v10.16,32.77 7.87,30.48 7.14,30.48 7.12,30.47 | DP:U4.1 31.25,24.63 29.27,26.61 25.21,26.61 | SA:U1.P$4 16.5,29.35 16.13,29.72 v15.75,29.72
SWD_CLK  (via drill 0.2)
  Top 0.152: MP:U1.P$22 21.47,34.04 21.97,34.54 MP:R4.1 21.99,35.05 v22.99,35.05 | v17.14,35.18 14.76,35.18 13.87,36.07 J4.P$9 | J5.4 v30.48,33.15
  Route4 0.152: v17.14,35.18 22.86,35.18 v22.99,35.05 26.04,35.05 v27.94,33.15 v30.48,33.15
SWD_DIO  (via drill 0.2)
  Top 0.152: MP:U1.P$24 20.47,33.13 v20.32,33.27 20.32,34.11 19.83,34.6 MP:R2.1 | v30.86,32.26 31.24,31.88 J5.2 | J4.P$8 13.47,36.06 14.86,34.67 v15.88,34.67
  Route4 0.152: v15.88,34.67 19.68,34.67 20.32,34.04 v20.32,33.27 21.46,34.42 25.65,34.42 27.81,32.26 v30.86,32.26
USB:VBUS  (via drill 0.65)
  Top 0.152: v6.47,33.66 v6.48,33.66
  Top 0.406: USB:FB1.2 7.53,33.03 6.91,33.66 v6.48,33.66 | USB:U1.VBUS v6.47,33.66
USB_5V
  Top 0.152: 6.25,24.39 CH:C1.1 7.53,26.14 USB:FB1.1 8.49,27.33 8.51,27.3 | J4.P$14 11.87,31.81 10.67,30.61 9.02,30.61 8.51,30.1 8.51,27.56 | 8.51,27.56 8.53,27.54 USB:C2.1 | USB:C1.1 9.03,25.64 8.51,26.16 8.51,27.3 | 8.51,27.3 8.51,27.56
  Top 0.254: CH:U1.13 6.25,24.39
  pour Top (isolate 0.254): 5.71,24.13 6.48,24.13 7.62,25.27 9.65,25.27 9.65,27.81 7.11,27.81 7.11,26.67 5.71,25.27
VCC_QIIC  (via drill 0.6, 0.65)
  Top 0.127: U2.A1 21.21,16.18
  Top 0.406: v26.42,16.18 21.21,16.18
  Route7 0.406: v26.42,16.18 v34.44,16.18 35.05,16.79 35.05,26.42 33.66,27.81 v33.66,35.05
  Bottom 0.152: J2.2 34.06,15.8 v34.44,16.18
  Bottom 0.406: v33.66,35.05 v33.66,35.04 J3.2
VS1  (via drill 0.2, 0.65)
  Top 0.15: RT:U1.3 36.47,29.02 RT:C1.1 36.83,27.94 v37.21,27.56
  Top 0.152: 15.51,17.93 RG:C2.1 15.08,17.82 | MP:U1.P$3 19.49,30.98 19.23,31.24 17.79,31.24 MP:C1.1 MP:C2.1 15.73,31.11 v14.22,31.11 13.47,31.87 J4.P$18 | MP:C5.1 28.83,33.05 MP:U2.6 | RG:L1.2 12.95,17.32 v12.95,16.51 | MP:R2.2 MP:R3.2 18.27,37.21 v17.53,37.21 | RT:R1.2 31.14,26.77 v31.11,26.8 RT:R2.2 | v27.94,34.67 28.81,34.67 MP:C5.1 | MP:C5.1 30.13,35.96 MP:R1.2 | J5.1 36.2,31.88 35.18,32.89 v35.18,34.04 | MP:U2.3 27.94,26.34 v27.6,26
  Top 0.254: RG:U1.5 15.51,17.93
  Top 0.305: 15.08,17.82 RG:L1.2
  Top 0.406: S1.1 34.33,11.68 v33.66,11.68
  pour Route5: 0,38.1 38.1,38.1 38.1,0 0,0
  pour Route4: 0,0 38.1,0 38.1,38.1 0,38.1
  pour Top (isolate 0.254): 12.32,15.88 12.32,18.16 14.61,18.16 14.73,18.03 15.75,18.03 15.75,17.27 14.73,17.27 13.34,15.88
VS2  (via drill 0.2, 0.6)
  Top 0.127: U1.A2 v18.87,16.18 U2.A2
  Top 0.152: J4.P$19 13.87,33.12 v14.1,32.89 | U1.A2 | U2.A2
  Top 0.406: S1.2 36.61,14.06 v36.2,14.48
  Bottom 0.15: SB:C9.1 33.27,28.19 33.27,27.69 33.4,27.56 34.16,27.56 34.56,27.16 SB:U4.P$8
  Bottom 0.152: SB:U4.P$2 34.16,27.56 | SB:C7.1 5.95,12.06 | 5.95,12.06 5.95,11.43 | 5.95,11.43 SB:C8.1 | SB:U1.P$14 15.45,12.79 SB:C1.1 | SA:C5.1 12.32,15.06 SA:U3.6 14.85,14.22 v16.38,14.22 15.49,13.33 SB:C1.1 | 13.1,28.57 SA:C1.1 13.1,29.99 v13.46,30.35 | 13.1,28.57 SA:C2.1 13.15,27.5 | 7.62,26.92 DP:U3.10 6.91,26.94 DP:C1.1 5.7,26.92 DP:U1.5 3.43,26.92 | 7.62,26.92 DP:U3.5 10.02,26.92 DP:C3.1 10.78,26.94 11.3,26.42 v12.06,26.42 13.15,27.5 | 31.75,23.37 DP:U4.10 29.99,23.37 DP:C2.1 29.96,23.37 DP:U2.5 27.3,23.37 | 31.75,23.37 DP:U4.5 34.15,23.37 DP:C4.1 | DP:U3.8 7.62,26.92 | DP:U4.8 31.75,23.37 | 27.3,23.37 DP:U2.10 26.23,23.37 25.1,24.5 SA:C3.1 | 27.3,23.37 DP:U2.8 v27.31,21.34 v27.3,21.34 | DP:U1.10 3.43,26.92 | SB:U7.C1 SB:U7.B1 | SB:U7.C1 SB:U7.D1 v11.18,5.85 v11.18,5.84 | v14.99,4.06 14.84,4.21 SB:C18.1 SB:C17.1 12.37,4.53 SB:U7.C1 | SB:U2.P$5 7.69,7.95 v7.75,8 | 2.54,2.81 3.68,2.81 SB:C14.1 4.94,2.94 v4.95,2.92 6.49,2.92 SB:C5.1 SB:C4.1 8.49,2.83 SB:U2.P$16 8.2,5.12 SB:U2.P$1 7.69,4.26 v7.49,4.06 | 2.54,2.81 SB:C13.1 | 2.54,2.81 2.54,4.4 SB:U5.P$10 2.58,4.73 SB:U5.P$1 2.75,5.03 3.35,5.63 SB:U5.P$6 | SB:C16.1 SB:C15.1 22.23,8.51 22.8,7.94 SB:U6.P$10 22.9,7.09 SB:U6.P$11 23.8,7.57 v23.8,8.15 | SB:C1.1 SB:C2.1 SB:U1.P$1 | SA:C3.1 24,23.23 SA:U2.P$3 24.03,22.38 23.03,21.38 SA:U2.P$13 | SA:U4.5 SA:U4.6 | SA:U4.6 16.84,22.35 SA:C6.1 SA:C7.1 | SA:U4.8 17.33,23.93 17.53,24.13 SA:C7.1 | SA:U1.P$14 13.7,26.96 13.15,27.5 | SA:U4.2 14.97,23.13 v15.37,22.73 15.77,22.33 SA:U4.6 | DP:U1.8 3.43,26.92 | SA:C7.1 18.91,24.89 20.07,24.89 20.46,24.5 SA:C4.1 | SA:U1.P$1 13.35,28.83 13.1,28.57 | SA:U3.2 18.2,16.86 v18.87,16.18 19.33,16.64 20.83,16.64 21.84,15.62 SA:C8.1
  Bottom 0.152: v5.33,12.06 5.95,12.06 | SA:U2.P$7 22.03,24.43 SA:C4.1 | SA:C3.1 SA:C4.1 | v28.32,8.76 28.34,8.75 BT:C1.1 29.35,8.74 | BT:U1.24 29.35,7.87 | 29.35,7.87 29.35,8.74 | SB:U3.P$5 5.9,11.38 5.95,11.43 | BT:U1.22 28.35,7.65 28.57,7.87 29.35,7.87 | SA:C8.1 21.92,15.56 SA:U5.P$1 | SA:C8.1 SA:C9.1 | SB:C9.1 33.03,29.7 32.64,30.1 v32.38,30.1 | SB:C10.1 33.26,28.18 33.27,28.19 | BT:C2.1 29.36,8.75 29.35,8.74
  pour Route14: 0,0 38.1,0 38.1,38.1 0,38.1

## Text on the board
tPlace: GND | USB | VS1 | QIIC | VS1 | PV_VOUT | Warp Rev. C | PV+ | GND | S/N
bPlace: FM ANT